# Altium PCB Project_PCBPcbDoc.PcbDoc
Units mil, origin at the board's own origin, x right, y up, seen from the top; angles counter-clockwise.
Board outline 1771.65 x 1377.95 mil, 4 copper layers (Top Layer, GND, PWR, Bottom Layer), stack 23.756 mil thick; 94 components, 61 nets, 344 pads, 210 vias.
Unrouted connection lines stored in the file: 22.
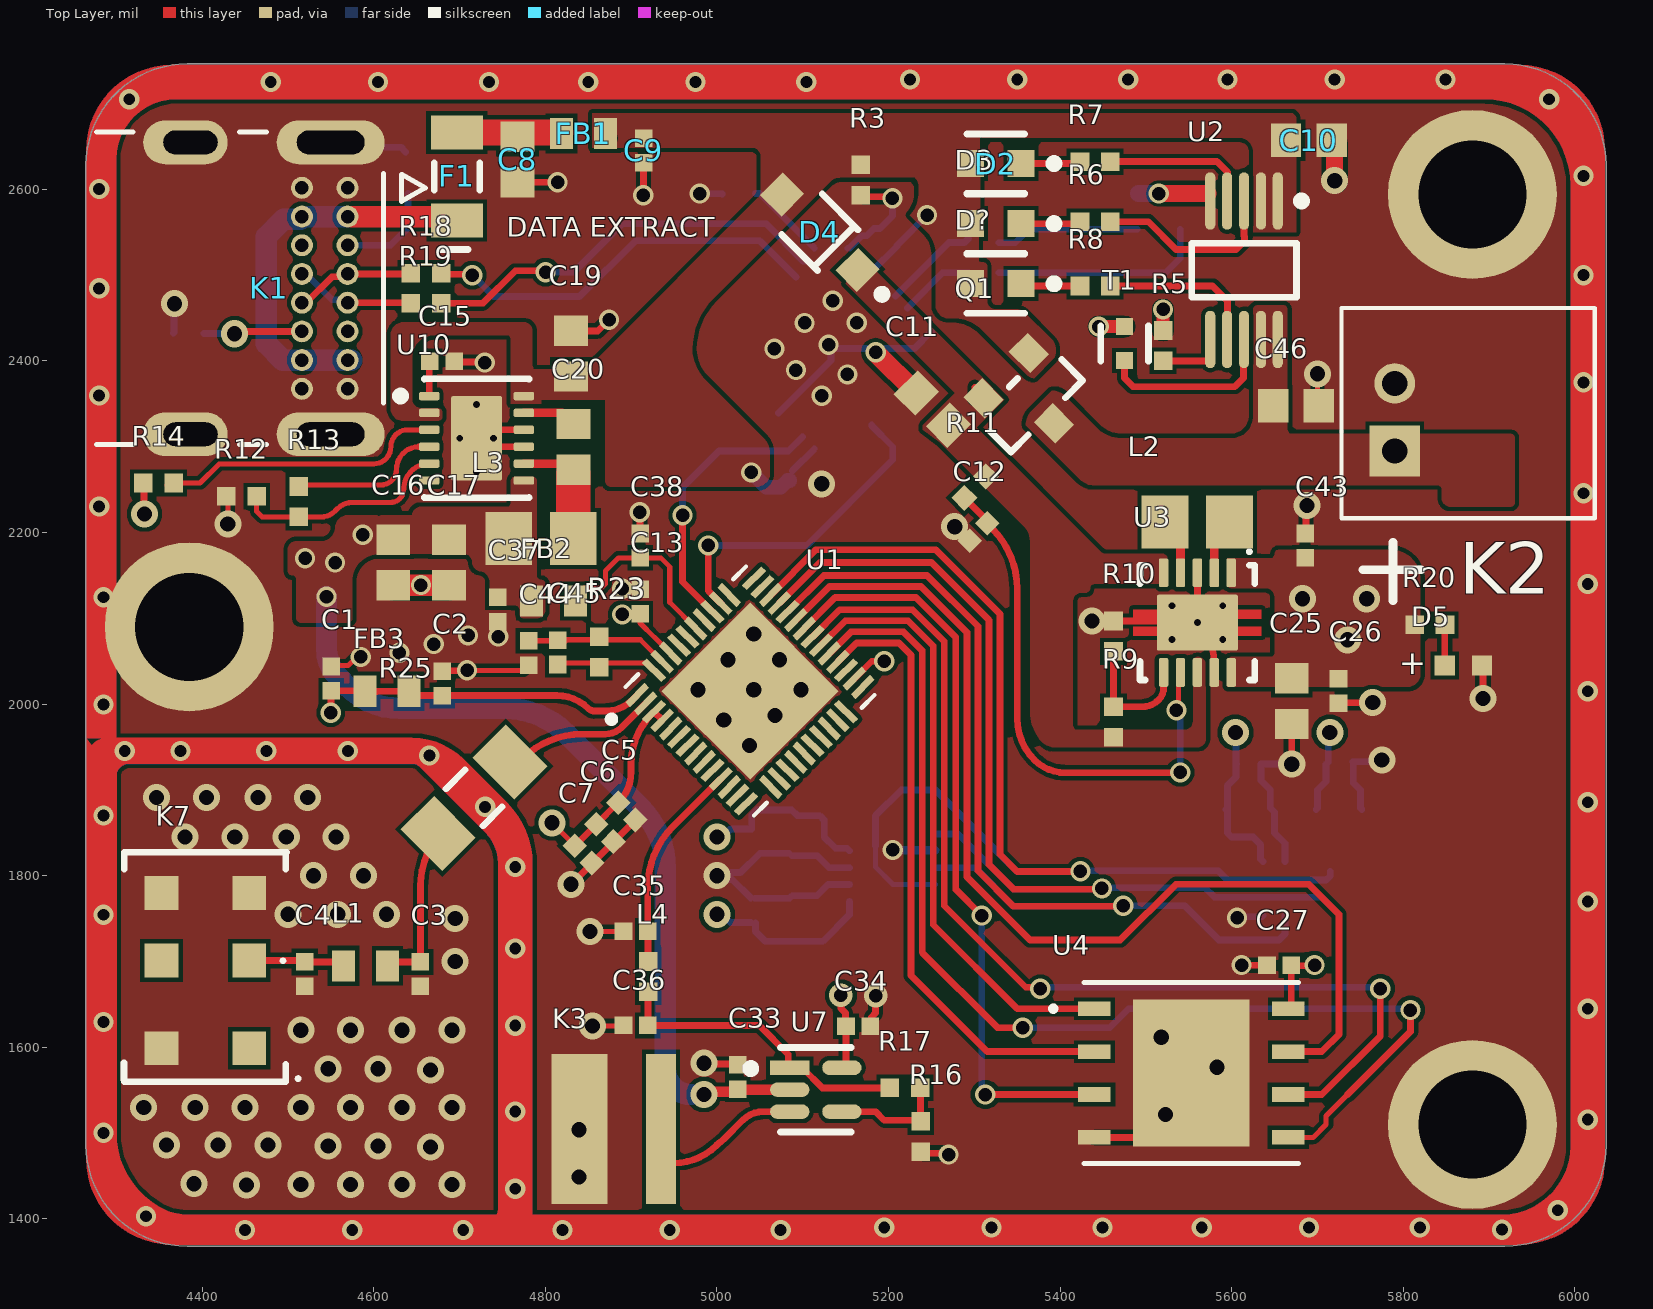
[diagram p0: Top Layer view]
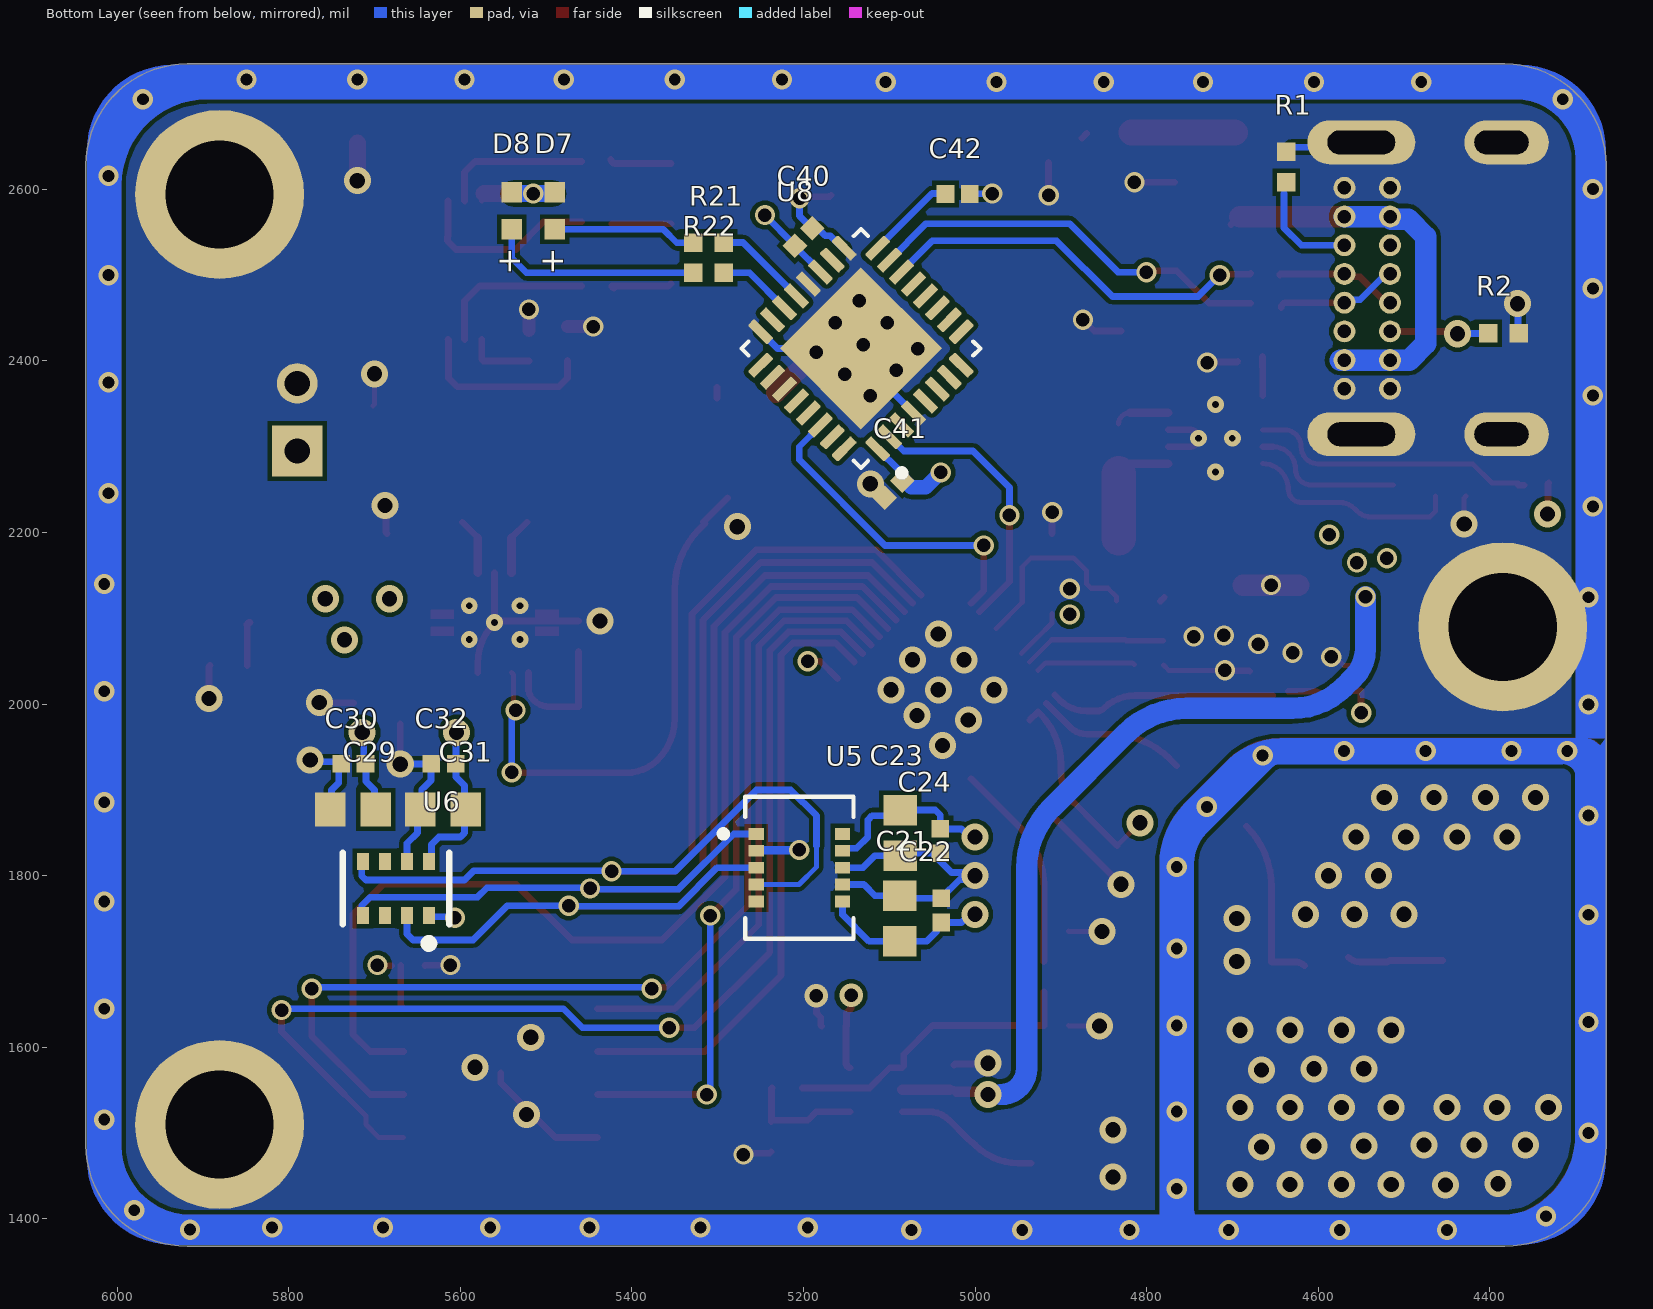
[diagram p1: Bottom Layer view, seen from below]
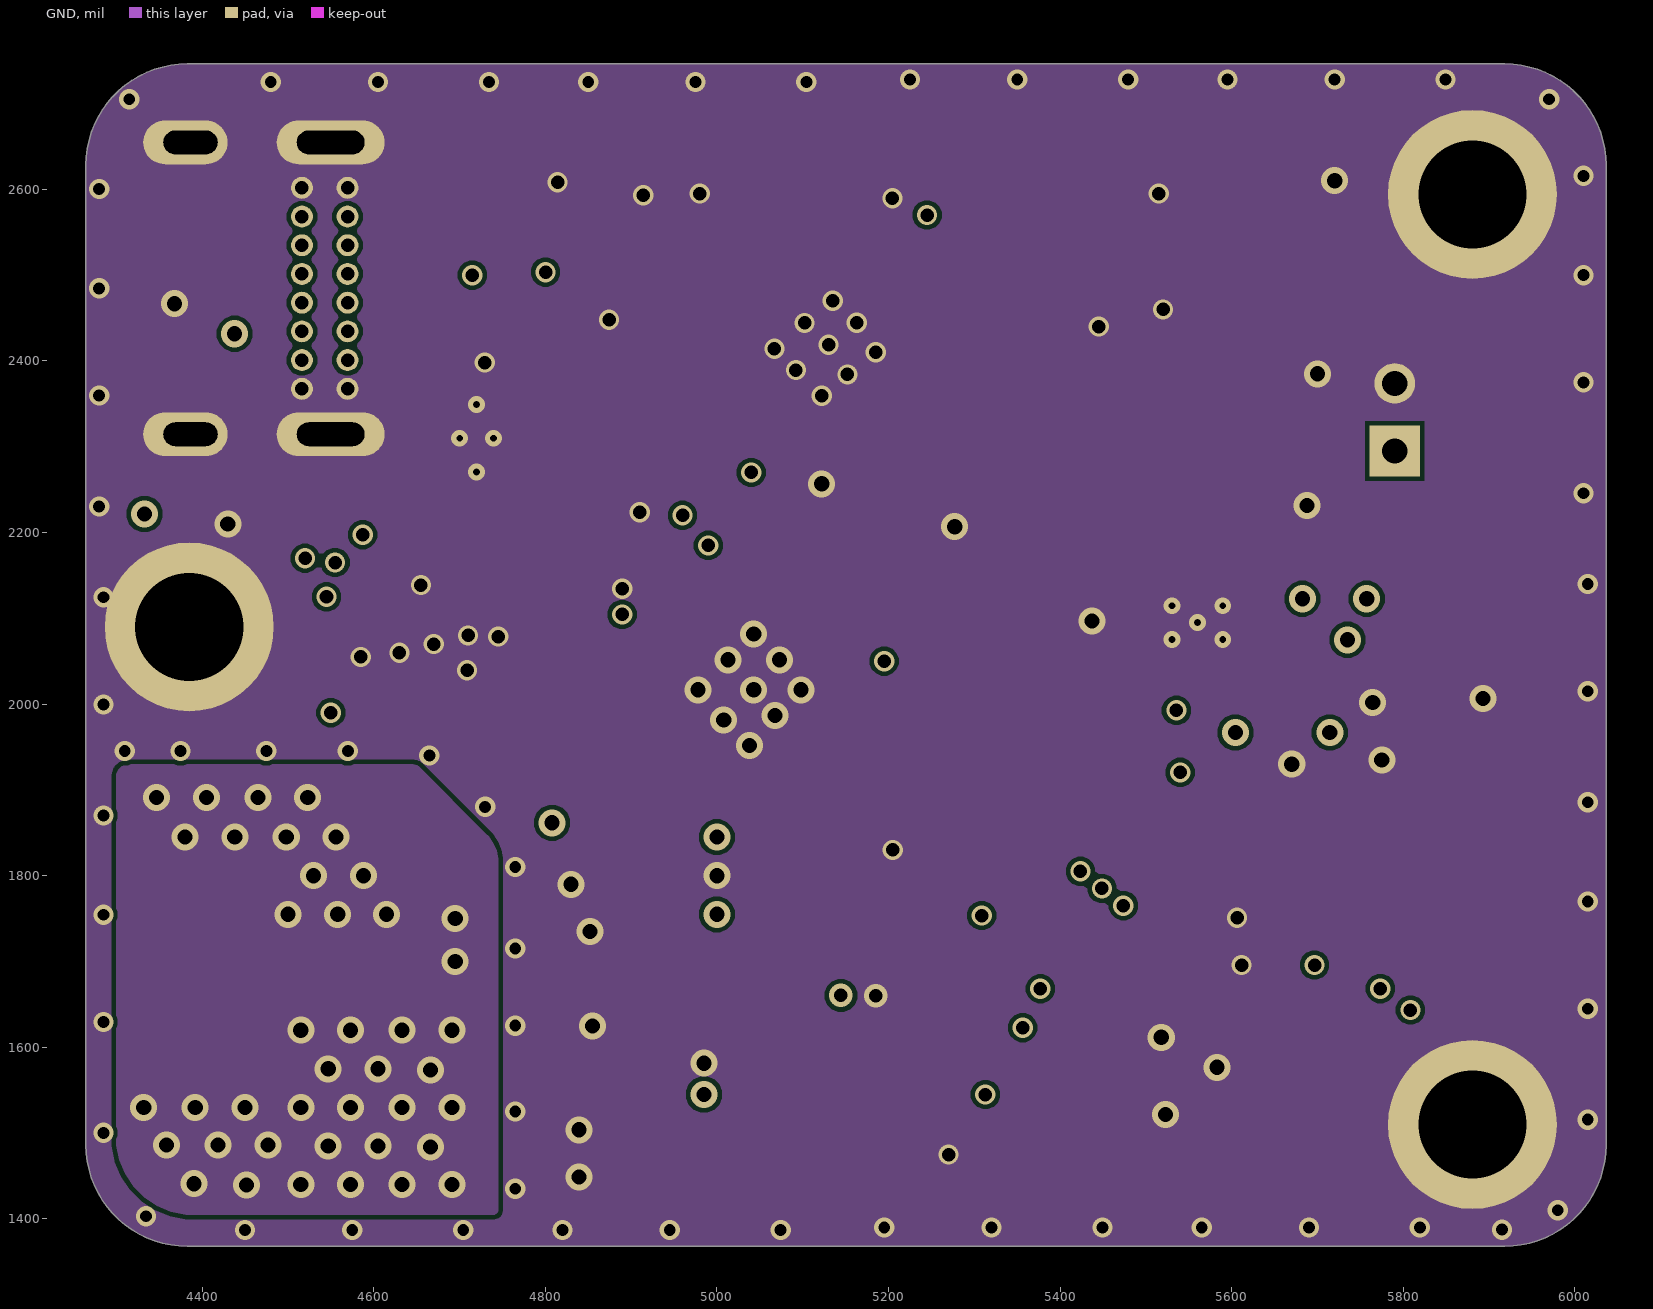
[diagram p2: GND]
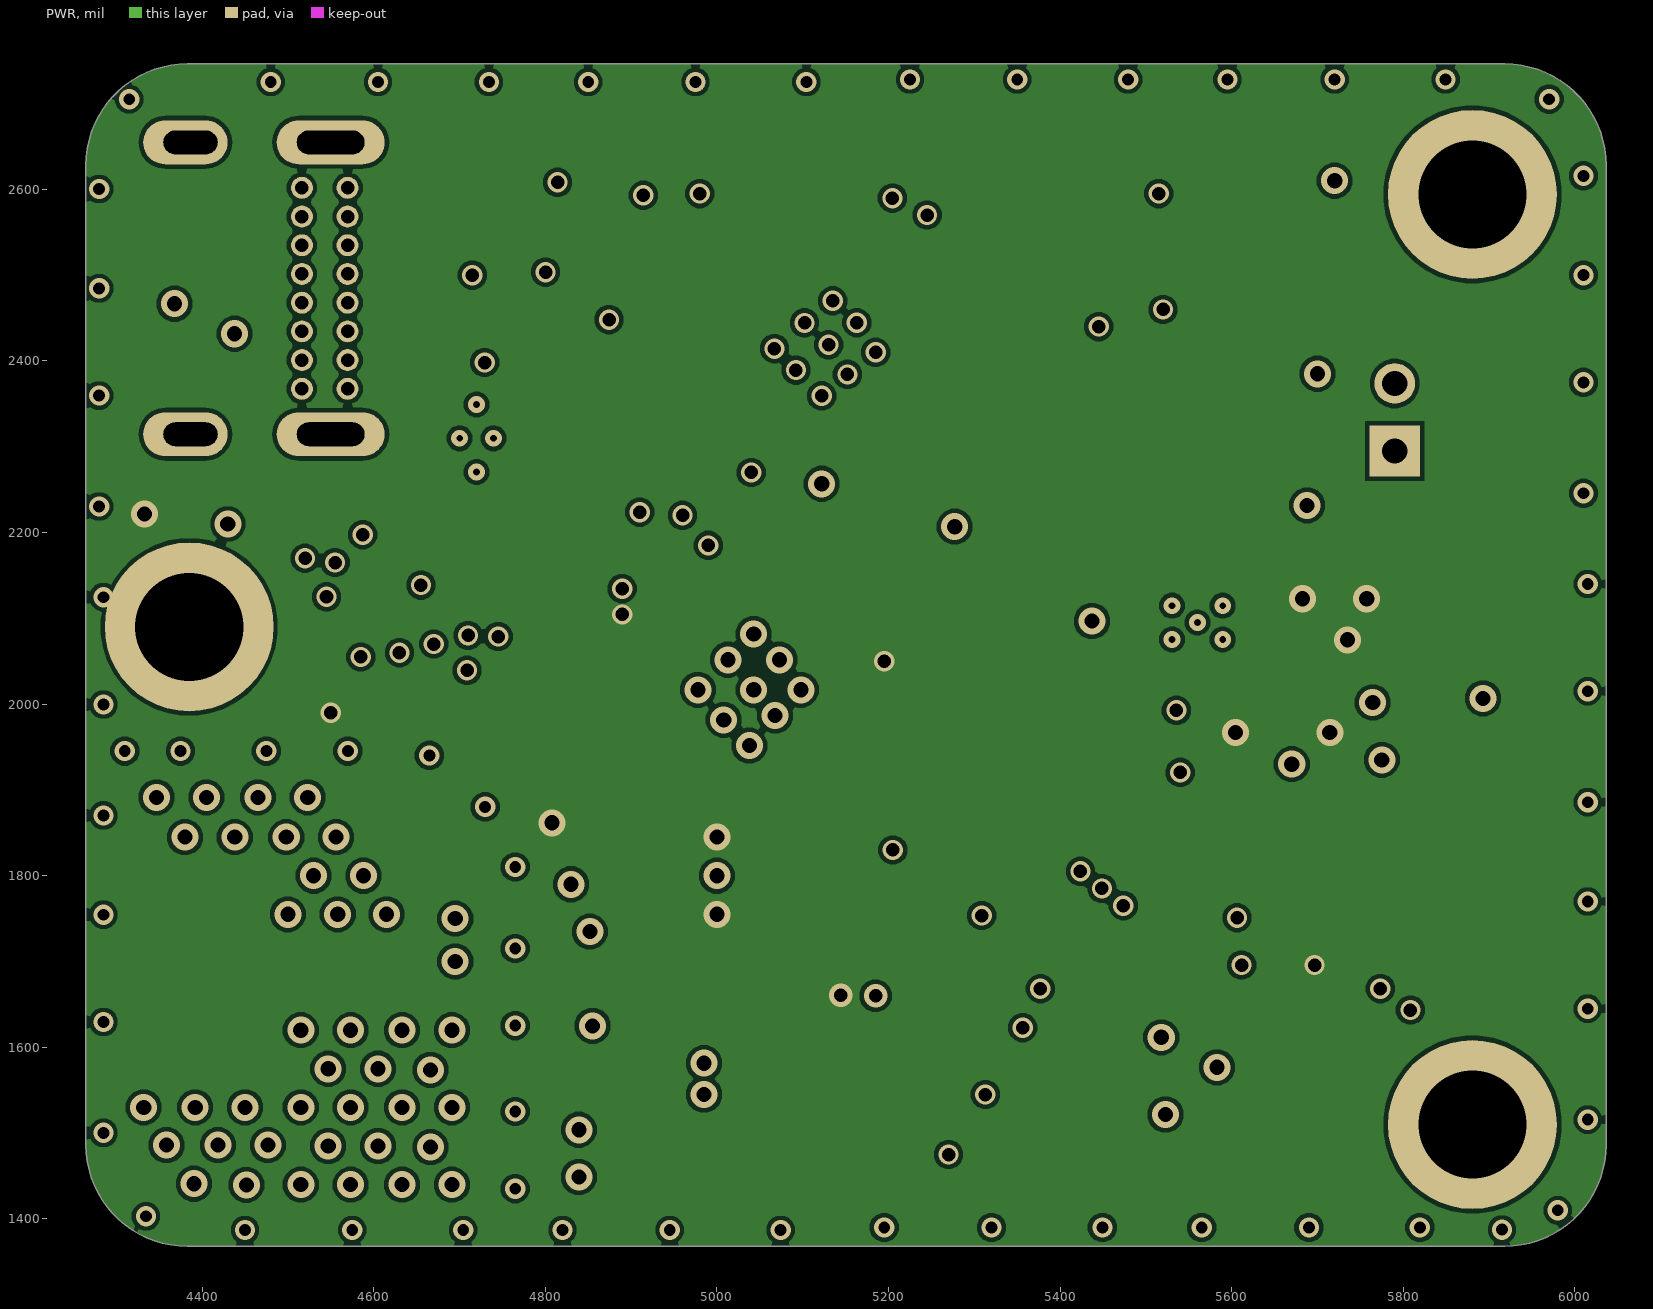
[diagram p3: PWR]
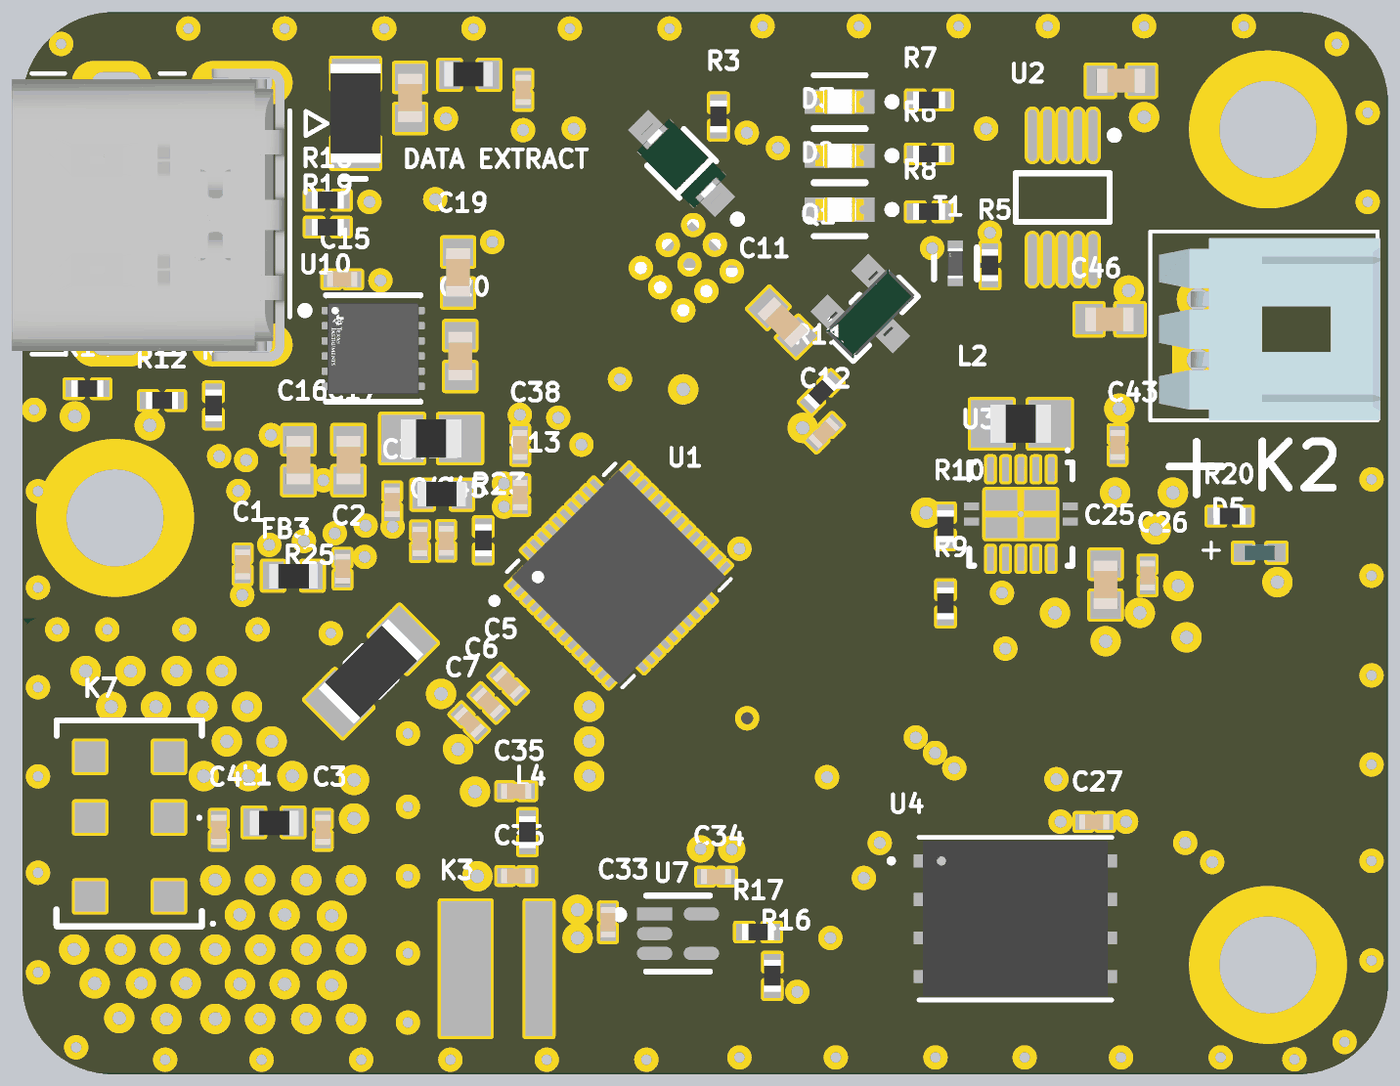
[diagram p4: 3D render of the assembled board from above, using the file's embedded part models]
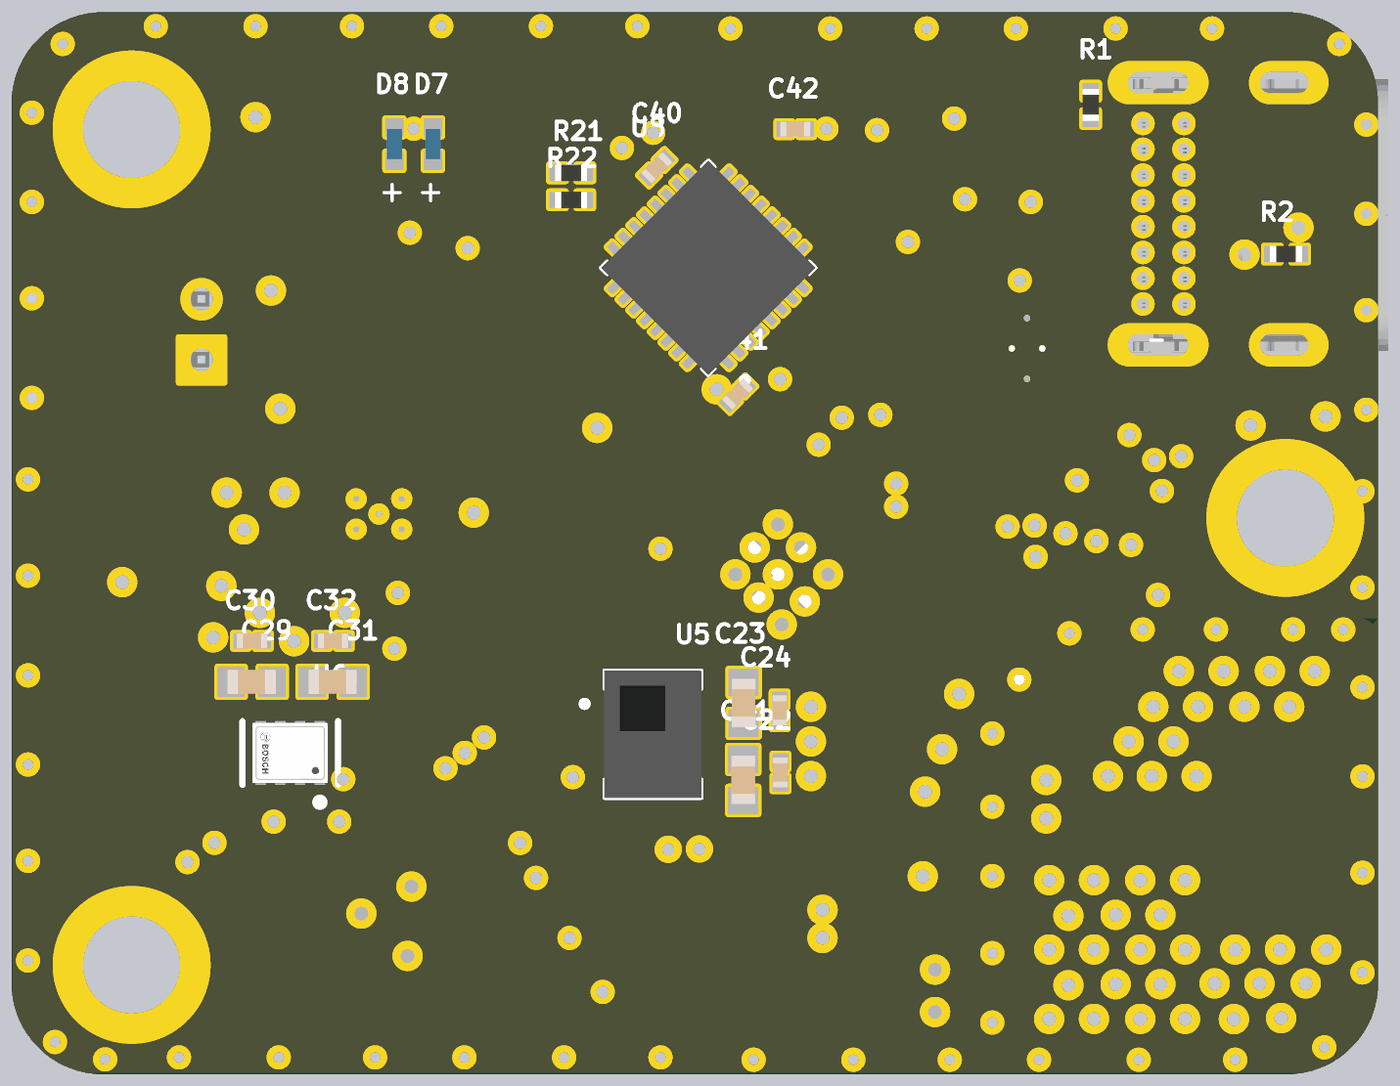
[diagram p5: 3D render of the assembled board from below, using the file's embedded part models]

## Layer stack, top to bottom
Top Solder: solder mask 0.4, Solder Resist, Dk 3.5
Top Layer: signal copper 1.4
Dielectric 2: prepreg 2.8, PP-006, Dk 4.1
GND: signal copper 1.378
Dielectric 1: dielectric 12.6, FR-4, Dk 4.8
PWR: signal copper 1.378
Dielectric 3: prepreg 2.8, PP-006, Dk 4.1
Bottom Layer: signal copper 1.4
Bottom Solder: solder mask 0.4, Solder Resist, Dk 3.5

## Board outline
4264.65,1486.26 4264.65,2627.99 cw(c4382.76,2627.99) 4382.76,2746.1 5918.19,2746.1 cw(c5918.19,2627.99) 6036.3,2627.99 6036.3,1486.26 cw(c5918.19,1486.26) 5918.19,1368.15 4382.76,1368.15 cw(c4382.76,1486.26)

## Design rules (kind name [scope] priority, off if disabled: settings)
Clearance [All] p1: gap=5 ignorepadtopadclearanceinfootprint=FALSE
PolygonConnect [All] p1: connectstyle=Direct reliefconductorwidth=10 reliefentries=4 polygonreliefangle="90 Angle" airgapwidth=10
RoutingVias [All] p1: holewidth=28 width=50 viastyle="Through Hole" minholewidth=28 minwidth=50 maxholewidth=28 maxwidth=50
SolderMaskExpansion [All] p1: expansion=4 istentingtop=FALSE
Width [All] p1: maxlimit=7.87 minlimit=5.91 preferedwidth=7.87
30 further rules are at their usual default settings.

## Components (designator, comment, footprint, x,y, rotation, side; value= is the part's Value field where it differs from the comment)
C1 "0.1uF" "0402 CAP" 4550,2030 r270 top
C2 "10uF" "0402 CAP" 4679.51,2024.52 r270 top
C3 "0.3pF" "0402 CAP" 4655,1685 r90 top
C4 "0.3pF" "0402 CAP" 4520,1685 r90 top
C5 "10uF" "0402 CAP" 4895.61,1875.08 r135 top
C6 "1uF" "0402 CAP" 4870,1850 r135 top
C7 "0.1uF" "0402 CAP" 4845,1825 r135 top
C8 "4.7uF" "0603 CAP" 4770,2635 r90 top
C9 "0.1uF" "0402 CAP" 4915,2645 r90 top
C10 "10uF" "0603 CAP" 5690,2655 r0 top
C11 "10uF" "0603 CAP" 5249.68,2342.14 r315 top
C12 "0.1uF" "0402 CAP" 5305,2200 r45 top
C13 "10uF" "0402 CAP" 4910,2120 r270 top
C15 "220nH" "0402 CAP" 4680,2400 r180 top
C16 "10uF" "0603 CAP" 4625,2165 r90 top
C17 "10uF" "0603 CAP" 4690,2165 r90 top
C19 "10uF" "0603 CAP" 4832.25,2408.51 r90 top
C20 "10uF" "0603 CAP" 4835,2300 r90 top
C21 "10uF" "0603 CAP" 5090,1750 r270 bottom
C22 "0.1uF" "0402 CAP" 5040,1760 r270 bottom
C23 "10uF" "0603 CAP" 5085,1850 r90 bottom
C24 "0.1uF" "0402 CAP" 5040,1840 r90 bottom
C25 "10uF" "0603 CAP" 5672.25,2003.51 r90 top
C26 "0.1uF" "0402 CAP" 5725,2015 r90 top
C27 "0.1uF" "0402 CAP" 5655,1695 r0 top
C29 "10uF" "0603 CAP" 5725,1875 r180 bottom
C30 "0.1uF" "0402 CAP" 5725,1930 r180 bottom
C31 "10uF" "0603 CAP" 5620,1875 r180 bottom
C32 "0.1uF" "0402 CAP" 5620,1930 r180 bottom
C33 "0.1uF" "0402 CAP" 5025,1565 r90 top
C34 "0.1uF" "0402 CAP" 5165,1625 r180 top
C35 "500nF" "0402 CAP" 4905,1735 r0 top
C36 "500nF" "0402 CAP" 4905,1625 r0 top
C37 "0.1uF" "0402 CAP" 4745,2110 r90 top
C38 "10uF" "0402 CAP" 4910,2185 r270 top
C40 "2.2uF" "0402 CAP" 5200,2545 r315 bottom
C41 "0.1uF" "0402 CAP" 5095,2250 r135 bottom
C42 "0.1uF" "0402 CAP" 5020,2595 r0 bottom
C43 "0.1uF" "0402 CAP" 5685,2185 r270 top
C44 "0.1uF" "0402 CAP" 4780,2060 r270 top
C45 "0.1uF" "0402 CAP" 4815,2060 r90 top
C46 "10uF" "0603 CAP" 5675,2350 r180 top
D2 "LTST-C190KGKT" FP-LTST-C190KGKT-MFG 5325,2630 r180 top
D3 "LTST-C190KGKT" FP-LTST-C190KGKT-MFG 5325,2560 r180 top
D4 "B130LAW-7-F" FP-SOD123-MFG 5120,2550 r135 top value=40pF
D5 "150040VS73240" WL-SMCC_0402_L1W0.5H0.4 5870,2045 r180 top
D7 "150040VS73240" WL-SMCC_0402_L1W0.5H0.4 5490,2575 r270 bottom
D8 "150040VS73240" WL-SMCC_0402_L1W0.5H0.4 5540,2575 r270 bottom
D? "LTST-C190KGKT" FP-LTST-C190KGKT-MFG 5325,2490 r180 top
F1 "600mA" s 4700,2615 r270 top
FB1 "120R@100MHZ" "0603 Inductor" 4845,2665 r180 top
FB2 "120R@100MHZ" "0603 Inductor" 4810,2120 r180 top
FB3 "120R@100MHZ" "0603 Inductor" 4615,2015 r0 top
K1 "USBC" usbc 4445,2480 r270 top locked
K2 "LiPo connector" "LiPo JST" 5788,2316.74 r270 top locked
K3 "pad_foam" pad_elastomer 4999,1471 r0 top
K7 "antenna" "BLE/WIFI antenna" 4360.64,1676 r0 top
L1 "2nH" "0603 Inductor" 4590,1695 r0 top
L2 "2.2uH" "power inductor" 5560,2215 r0 top
L3 "4.7uH" "power inductor" 4795,2190 r180 top
L4 "400nH" "0402 RES" 4922.28,1681.4 r90 top
Q1 "DMP1045U-7" FP-SOT23-MFG 5365,2355 r315 top
R1 "5.11k" "0402 RES" 4635,2625 r90 bottom
R2 "5.11k" "0402 RES" 4385,2430 r180 bottom
R3 "100kR" "0402 RES" 5170,2610 r90 top
R5 "2kR" "0402 RES" 5517.72,2418.6 r270 top
R6 "1kR" "0402 RES" 5440,2560 r0 top
R7 "1kR" "0402 RES" 5440,2630 r0 top
R8 "1kR" "0402 RES" 5440,2485 r0 top
R9 "136.2kR" "0402 RES" 5460,1980 r270 top
R10 "68.1kR" "0402 RES" 5460,2080 r270 top
R11 "100R" "0402 RES" 5300,2255 r225 top
R12 "47kR" "0402 RES" 4445,2240 r0 top
R13 "174.9kR" "0402 RES" 4515,2235 r90 top
R14 "100kR" "0402 RES" 4350,2260 r180 top
R16 "330kR" "0402 RES" 5240,1495 r90 top
R17 "30kR" "0402 RES" 5220,1555 r180 top
R18 "33R" "0402 RES" 4660,2500 r0 top
R19 "33R" "0402 RES" 4660,2465 r0 top
R20 "1kR" "0402 RES" 5830,2090 r0 top
R21 "1kR" "0402 RES" 5310,2540 r0 bottom
R22 "1kR" "0402 RES" 5310,2505 r0 bottom
R23 "1kR" "0402 RES" 4865,2060 r90 top
R25 "0R" "1206 RES" 4715,1885 r45 top
T1 "Nom 10kR" FP-NTCG10-MFG 5475,2420.32 r90 top
U1 "ESP32" esp32 5038.6,2015.27 r45 top
U2 "MCP73833-GPI/UN" MSOP-UN10_N 5614.37,2505.71 r270 top
U3 "TPS63001DRCR" DRC0010J_V 5560,2095 r270 top
U4 "flash storage" "flash storage" 5543.77,1549.15 r0 top
U5 "ir temp sensor" "IR temp sensor" 5209.8,1799.37 r180 bottom
U6 "BMP280" FP-BMP280-MFG 5675,1785 r270 bottom
U7 "MCP6006T-E/LT" FP-C04-061-LT-IPC_C 5115.32,1550.59 r0 top
U8 "ftdi" ftdi 5131.79,2413.97 r45 bottom
U10 "TPS63710DRRT" FP-DRR0012C-MFG 4719.88,2309.84 r0 top

## Footprints (in the part's own frame and the unit in brackets; to place one, negate y for a bottom-side part, rotate by r counter-clockwise, add the part's x,y. Pads: shape width x height; smd on the part's side, far side on the other; paste and mask are expansions set on the pad)
"0402 CAP" [mm]
  rect 0.52x0.52 smd: 1(-0.351,0.013) 2(0.369,0.013)
  body extent -0.49,-0.24 0.51,0.26, height 0.46
"0402 RES" [mm]
  rect 0.55x0.55 smd: 1(-0.428,0.058) 2(0.472,0.058)
  body extent -0.5,-0.22 0.55,0.33, height 0.4
"0603 CAP" [mm]
  rect 0.9x1 smd: 1(-0.677,0.057) 2(0.673,0.057)
  body extent -0.8,-0.34 0.8,0.46, height 0.78
"0603 Inductor" [mm]
  rect 0.68x0.92 smd: 1(-0.635,0) 2(0.66,0)
  body extent -0.76,-0.42 0.84,0.38, height 0.81
"1206 RES" [mm]
  rect 1.4x1.75 smd: 1(-1.36,0.069) 2(1.64,0.069)
  silkscreen extent -0.26,-0.71 0.54,0.84, body extent -1.48,-0.76 1.77,0.89, height 0.7
"BLE/WIFI antenna" [mm]
  rect 1x1 smd: 1(2.397,-1.958) 2(2.397,0.642) 3(2.397,2.642) 4(-0.203,2.642) 5(-0.203,0.642) 6(-0.203,-1.958)
  silkscreen extent -1.31,-2.95 3.89,3.84, body extent -1.15,-2.82 3.35,3.69, height 0.5
DRC0010J_V [mm] "SON, 10-Leads, Body 3x3mm, Pitch 0.5mm, Thermal Pad 2.4x1.65mm, TI Recommended"
  rrect36% 0.85x0.28 smd paste-0.025 mask+0.07: 1(-1.475,1) 2(-1.475,0.5) 3(-1.475,0) 4(-1.475,-0.5) 5(-1.475,-1) 6(1.475,-1) 7(1.475,-0.5) 8(1.475,0) 9(1.475,0.5) 10(1.475,1)
  rrect6% 1.65x2.4 smd paste-0.825 mask+0.07: 11(0,0)
  Top Layer region: -0.39,1.2 -0.11,1.2 -0.11,1.9 -0.39,1.9
  Top Layer region: 0.39,1.9 0.11,1.9 0.11,1.2 0.39,1.2
  Top Layer region: 0.39,-1.2 0.11,-1.2 0.11,-1.9 0.39,-1.9
  Top Layer region: -0.39,-1.9 -0.11,-1.9 -0.11,-1.2 -0.39,-1.2
  silkscreen extent -2.15,-1.7 1.7,1.7, body extent -1.55,-1.55 1.55,1.55, height 1
esp32 [mm]
  rrect5% 0.81x0.2 smd: 1(-2.445,2.275) 2(-2.445,1.925) 3(-2.445,1.575) 4(-2.445,1.225) 5(-2.445,0.875) 6(-2.445,0.525) 7(-2.445,0.175) 8(-2.445,-0.175) 9(-2.445,-0.525) 10(-2.445,-0.875) 11(-2.445,-1.225) 12(-2.445,-1.575) 13(-2.445,-1.925) 14(-2.445,-2.275) 25(2.445,-2.275) 26(2.445,-1.925) 27(2.445,-1.575) 28(2.445,-1.225) 29(2.445,-0.875) 30(2.445,-0.525) 31(2.445,-0.175) 32(2.445,0.175) 33(2.445,0.525) 34(2.445,0.875) 35(2.445,1.225) 36(2.445,1.575) 37(2.445,1.925) 38(2.445,2.275)
  rrect5% 0.2x0.81 smd: 15(-1.575,-2.445) 16(-1.225,-2.445) 17(-0.875,-2.445) 18(-0.525,-2.445) 19(-0.175,-2.445) 20(0.175,-2.445) 21(0.525,-2.445) 22(0.875,-2.445) 23(1.225,-2.445) 24(1.575,-2.445) 39(1.575,2.445) 40(1.225,2.445) 41(0.875,2.445) 42(0.525,2.445) 43(0.175,2.445) 44(-0.175,2.445) 45(-0.525,2.445) 46(-0.875,2.445) 47(-1.225,2.445) 48(-1.575,2.445)
  rect 3.7x3.7 smd paste-3: 49(0,0)
  silkscreen extent -3.59,-2.69 2.52,2.69, body extent -2.54,-2.54 2.46,2.46, height 0.9
"flash storage" [mil]
  rect 38x17 smd paste+0 mask+0: 1(-103.77,95.85) 2(-103.77,45.85) 3(-103.77,-4.15) 4(-103.77,-54.15) 5(122.23,-54.15) 6(122.23,-4.15) 7(122.23,45.85) 8(122.23,95.85)
  rect 136x171 smd paste+0 mask+0: 9(9.23,20.85)
  silkscreen extent -155,-85 134,126, body extent -111,-80 129,121, height 32
FP-BMP280-MFG [mm]
  rect 0.5x0.35 smd paste+0 mask+0: 1(0.8,0.975) 2(0.8,0.325) 3(0.8,-0.325) 4(0.8,-0.975) 5(-0.8,-0.975) 6(-0.8,-0.325) 7(-0.8,0.325) 8(-0.8,0.975)
  silkscreen extent -1.05,-1.58 1.75,1.58, body extent -1,-1.25 1,1.25, height 1
FP-C04-061-LT-IPC_C [mm]
  rect 1.164x0.43 smd paste+0 mask+0: 1(-0.77,0.65)
  rrect100% 1.164x0.43 smd paste+0 mask+0: 2(-0.77,0) 3(-0.77,-0.65) 4(0.77,-0.65) 5(0.77,0.65)
  silkscreen extent -2.05,-1.25 1.05,1.25
FP-DRR0012C-MFG [mm]
  rrect40% 0.6x0.25 smd paste+0 mask+0: 1(-1.4,1.25) 2(-1.4,0.75) 3(-1.4,0.25) 4(-1.4,-0.25) 5(-1.4,-0.75) 6(-1.4,-1.25) 7(1.4,-1.25) 8(1.4,-0.75) 9(1.4,-0.25) 10(1.4,0.25) 11(1.4,0.75) 12(1.4,1.25)
  rrect7% 1.5x2.5 smd paste-1000 mask+0: 13(0,0)
  silkscreen extent -2.37,-1.76 1.55,1.76, body extent -1.8,-1.65 1.8,1.65, height 0.25
FP-LTST-C190KGKT-MFG [mm]
  rect 0.8x0.8 smd paste+0 mask+0: 1(-0.75,0) 2(0.75,0)
  silkscreen extent -1.85,-0.87 0.85,0.87, body extent -1.25,-0.55 1.25,0.55, height 0.25
FP-NTCG10-MFG [mm]
  rect 0.5x0.5 smd paste+0 mask+0: 1(-0.5,0) 2(0.5,0)
  silkscreen extent -0.53,-0.71 0.53,0.7, body extent -0.85,-0.38 0.85,0.38, height 0.25
FP-SOD123-MFG [mm]
  rect 0.9x0.95 smd paste+0 mask+0: 1(-1.575,0) 2(1.575,0)
  silkscreen extent -2.72,-0.85 0.75,0.85, body extent -2.12,-0.95 2.12,0.95, height 0.25
FP-SOT23-MFG [mm]
  rect 0.9x0.8 smd paste+0 mask+0: 1(-1,0.95) 2(-1,-0.95) 3(1,0)
  silkscreen extent -0.7,-1.5 0.7,1.5, body extent -1.55,-1.6 1.55,1.6, height 0.25
ftdi [mm]
  rrect25% 0.81x0.27 smd: 1(-2.418,1.764) 2(-2.418,1.264) 3(-2.418,0.764) 4(-2.418,0.264) 5(-2.418,-0.236) 6(-2.418,-0.736) 7(-2.418,-1.236) 8(-2.418,-1.736) 17(2.482,-1.736) 18(2.482,-1.236) 19(2.482,-0.736) 20(2.482,-0.236) 21(2.482,0.264) 22(2.482,0.764) 23(2.482,1.264) 24(2.482,1.764)
  rrect25% 0.27x0.81 smd: 9(-1.718,-2.436) 10(-1.218,-2.436) 11(-0.718,-2.436) 12(-0.218,-2.436) 13(0.282,-2.436) 14(0.782,-2.436) 15(1.282,-2.436) 16(1.782,-2.436) 25(1.782,2.464) 26(1.282,2.464) 27(0.782,2.464) 28(0.282,2.464) 29(-0.218,2.464) 30(-0.718,2.464) 31(-1.218,2.464) 32(-1.718,2.464)
  rect 3.4x3.4 smd paste-0.62: 33(0.032,0.014)
  silkscreen extent -3.53,-2.49 2.53,2.51, body extent -2.47,-2.49 2.53,2.51, height 0.9
"IR temp sensor" [mm]
  rect 0.45x0.35 smd paste-1 mask+0.05: 1(-1.148,1.254) 2(-1.148,0.754) 3(-1.148,0.254) 4(-1.148,-0.246) 5(-1.148,-0.746) 6(1.402,-0.746) 7(1.402,-0.246) 8(1.402,0.254) 9(1.402,0.754) 10(1.402,1.254)
  silkscreen extent -2.22,-1.85 1.73,2.35, body extent -1.47,-1.85 1.73,2.35, height 1.46
"LiPo JST" [mm]
  rect 1.5x1.5 hole 0.75: 1(0.552,0.051)
  round 1.2 hole 0.75: 2(-1.448,0.051)
  silkscreen extent -3.68,-1.52 4.98,5.97, body extent -3.46,-1.24 2.54,6.06, height 4.2
MSOP-UN10_N [mm] "TSSOP, 10-Leads, Body 3x3mm, Pitch 0.5mm, IPC Medium Density"
  oval 1.7x0.3 smd: 1(-2.05,1) 2(-2.05,0.5) 3(-2.05,0) 4(-2.05,-0.5) 5(-2.05,-1) 6(2.05,-1) 7(2.05,-0.5) 8(2.05,0) 9(2.05,0.5) 10(2.05,1)
  silkscreen extent -2.17,-1.55 0.8,1.83, body extent -1.55,-1.55 1.55,1.55, height 1.1
pad_elastomer [mil]
  rect 65x175 smd: 1(-159,34)
  rect 35x175 smd: 2(-64,34)
"power inductor" [mm]
  rect 1.39x1.57 smd: 1(-0.955,-0.076) 2(0.955,-0.076)
  body extent -1,-0.7 1,0.55, height 1.02
s [mm]
  rect 1x1.55 smd: 1(-1.3,-0.076) 2(1.3,-0.076)
  silkscreen extent -0.4,-0.75 2.16,0.6, body extent -1.62,-0.9 1.63,0.75, height 0.7
usbc [mm]
  round 0.648 hole 0.4 mask+0.064: A1(-3.092,3.164) A4(-2.242,3.164) A5(-1.392,3.164) A6(-0.542,3.164) A7(0.308,3.164) A8(1.158,3.164) A9(2.008,3.164) A12(2.858,3.164) B1(2.858,1.814) B4(2.008,1.814) B5(1.158,1.814) B6(0.308,1.814) B7(-0.542,1.814) B8(-1.392,1.814) B9(-2.242,1.814) B12(-3.092,1.814)
  oval 1.3x2.5 hole 0.7 slot 1.6 at 90 deg copper offset 0,-0.15 mask+0.064: SH1(-4.437,-1.486) SH2(4.203,-1.486)
  oval 1.3x3.2 hole 0.7 slot 2 at 90 deg mask+0.064: SH3(-4.437,2.664) SH4(4.203,2.664)
  silkscreen extent -4.74,-4.26 4.51,5.46, body extent -4.9,-4.92 4.74,4.05, height 3.17
WL-SMCC_0402_L1W0.5H0.4 [mm] "SMD Mono-color Chip LED Compact, body 1x0.5mm"
  rect 0.6x0.6 smd: 1(-0.55,0) 2(0.55,0)
  body extent -0.5,-0.25 0.5,0.25, height 0.4

## Part data
C1 C2 C3 C4 C5 C6 C7 C8 C9 C10 C11 C12 C13 C15 C16 C17 C19 C20 C21 C22 C23 C24 C25 C26 C27 C29 C30 C31 C32 C33 C34 C35 C36 C37 C38 C40 C41 C42 C43 C44 C45 C46: library part capacitor
D2 D3 D?: library part CMP-2000-05197-2, "LED GREEN CLEAR CHIP SMD", Case Code (Imperial)=0603, Case Code (Metric)=1608, Color=Green, Forward Current=30mA, Forward Voltage=2V, Lens Color=Colorless, Max Operating Temperature=85°C, Min Operating Temperature=-55°C, Package Quantity=1, Power Dissipation=75mW, Reverse Voltage=5V, Test Current=20mA, Case/Package=0603, Depth=0.8mm, Dominant Wavelength=571nm, Height=0.8mm, Illumination Color=Green, Lead Free="Lead Free", Length=1.6mm, Lens Style=Diffused, Lens Transparency=Clear, Luminous Intensity=35mcd, Mount="Surface Mount", Number of Elements=1, Number of LEDs=1, Number of Pins=2, Packaging="Tape and Reel", Power Rating=75mW, Radiation Hardening=No, Viewing Angle=130°, Wavelength=574nm, Width=0.8mm
D4: library part CMP-2000-05884-2, "DIODE SCHOTTKY 30V 1A SOD123", Capacitance=40pF, Forward Current=1A, Manufacturer="Diodes Inc.", Max Junction Temp=+125°C, Max Repetitive Reverse Voltage=30V, Max Surge Forward Current=12A, Package=SOD123, Peak Reverse Current=0.15mA, Temperature="-55°C to +125°C", Temperature Range Low=-55°C, Automotive=No, Category=Diode, ComponentLink2Description=Datasheet, ComponentLink2URL=https://www.diodes.com/assets/Datasheets/ds30308.pdf, Device Class L1="Discrete Semiconductors", Device Class L2=Diodes, Device Class L3="Schottky Diodes", Digikey Description="DIODE SCHOTTKY 30V 1A SOD123", Footprint Url=https://www.diodes.com/assets/Package-Files/SOD123.pdf, Height=1.45mm, Ipc Land Pattern Name=SOD365155X110-2, Lead Free=Yes, Manufacturer Part Number=B130LAW-7-F, Mouser Description="Schottky Diodes & Rectifiers 30V 1A", Octopart=https://octopart.com/b130law-7-f-diodes+inc.-325739, Reverse Voltage=30V, RoHS=TRUE, Standoff Height=0mm, Temperature Range High=+125°C
D5 D7 D8: library part CMP-03913-90235559-1, "150040VS73240 WL-SMCC SMT Mono-Color Chip LED Compact", Case/Package=0402, Color=Green, Forward Current=60mA, Forward Voltage=2V, Max Junction Temperature (Tj)=95°C, Max Operating Temperature=85°C, Max Reverse Voltage (DC)=5V, Min Operating Temperature=-40°C, Power Dissipation=75mW, Dominant Wavelength=570nm, Height=400µm, Length=1mm, Luminous Intensity=50mcd, NexarPartId=90235559, Packaging="Tape and Reel", Peak Wavelength=572nm, Reverse Voltage=5V, RoHS=Compliant, Viewing Angle=120°, Wavelength=570nm, Width=500µm
F1: library part polyfuse
FB1 FB2 FB3: library part "Ferrite Bead"
L1 L4: library part "inductor 0603"
L2 L3: library part "power inductor"
Q1: library part CMP-12801-000025-1, "MOSFET P-CH 12V 4A SOT23", Continuous Drain Current=4A, Drain To Source Breakdown Voltage=-12V, Drain To Source Resistance=26mΩ, Gate To Source Voltage=8V, Input Capacitace At Vds="1357pF @ -10V", Manufacturer="Diodes Inc.", Max Junction Temp=+150°C, Package=SOT23, Power Dissipation=0.8W, Pulse Drain Current=40A, Temperature="-55°C to +150°C", Temperature Range Low=-55°C, Typ Forward Diode Voltage=-0.6V, Automotive=No, Automotive Grade=NA, Category=Trans, ComponentLink2Description=Datasheet, ComponentLink2URL=https://www.diodes.com/assets/Datasheets/DMP1045U.pdf, Depletion Mode=False, Device Class L1="Discrete Semiconductors", Device Class L2=Transistors, Device Class L3=MOSFETs, Digikey Description="MOSFET P-CH 12V 4A SOT23", Drain To Source Voltage=-12V, Footprint Url=https://www.diodes.com/assets/Package-Files/SOT23.pdf, Gate Charge At Vgs="15.8nC @ -4.5V", Height=1.1mm, Ipc Land Pattern Name=SOT92P240X102-3, Lead Free=Yes, Manufacturer Part Number=DMP1045U-7, Mouser Description="P-Channel 12 V 31 mOhm Surface Mount Enhancement Mode Mosfet - SOT-23-3", Number Of Channels=1, Number Of P Channels=1, Octopart=https://octopart.com/dmp1045u-7-diodes+inc.-20474459, RoHS=TRUE, Rthja Max=168°C/W, Standoff Height=0.013mm, Temperature Range High=+150°C, Threshold Vgs Max=-1V, Threshold Vgs Min=-0.3V, Turn Off Delay Time=91.2ns, Turn On Delay Time=15.7ns
R1 R2 R3 R5 R6 R7 R8 R9 R10 R11 R12 R13 R14 R16 R17 R18 R19 R20 R21 R22 R23: library part Resistor
R25: library part "0603 RES"
T1: library part CMP-08233-000003-1, "THERMISTOR NTC 10KOHM 3380K 0402", Case Code (Imperial)=0402, Case Code (Metric)=1005, Max Operating Temperature=125°C, Min Operating Temperature=-40°C, Tolerance=1%, Case/Package=0402, Mount="Surface Mount", Number of Pins=2, Packaging="Tape and Reel"
U2: library part CMP-0133-00193-1, "Stand-Alone Linear Li-Ion/Li-Polymer Charge Management Controller with Power-Good Output, 4.2V, 10-Pin MSOP, Industrial Temperature", DatasheetVersion="revB, May-2009", PackageDescription="10-Lead Plastic Micro Small Outline Package (UN) [MSOP]", PackageReference=MSOP-UN10, PackageVersion="revBB, Aug-2009"
U3: library part CMP-0345-00006-2, "Buck-Boost Voltage Converter with 1.8 to 5.5 V Input and 3.3 V Output, -40 to 85 degC, 10-Pin SON (DRC), Green (RoHS & no Sb/Br)", Dynamic Voltage Scaling=TRUE, Manufacturer="Texas Instruments", Switching Frequency(Max)(kHz)=1500, ComponentLink1Description=Datasheet, ComponentLink1URL=http://www.ti.com/general/docs/lit/getliterature.tsp?genericPartNumber=TPS63001&fileType=pdf, ComponentLink2Description="Package Specification", ComponentLink2URL=http://www.ti.com/litv/pdf/mpds117k, DatasheetVersion=SLVS520B, Eco-Plan="Green (RoHS & no Sb/Br)", Iout(Max)(A)=1.2, Iq(Typ)(mA)=0.03, Mounting Technology="Surface Mount", PackageDescription="10-Pin Plastic Small Outline No-Lead, 3 x 3 x 1 mm Body, 0.5 mm Pitch, Exposed Pad", PackageReference=DRC0010J, PackageVersion="revL, Sep-2011", PartNumber=TPS63001DRCR, Preset Vout(V)=3.3, Regulated Outputs(#)=1, SubFamily="Buck-Boost Regulator", Synchronous Rectification=TRUE, Topology=Buck-Boost, Vin(Max)(V)=5.5, Vin(Min)(V)=1.8, Vout(Max)(V)=3.3, Vout(Min)(V)=3.3
U6: library part CMP-2000-05076-3, "SENSOR PRESSURE ABS", Case/Package=SMD/SMT, Max Operating Temperature=85°C, Min Operating Temperature=-40°C, Operating Pressure=15.95PSI, Lead Free="Lead Free", Max Pressure=290.08PSI, Number of Pins=8, Output Type=SPI, Port Style="No Port", Pressure Type=Absolute, Termination=SMD/SMT
U7: library part CMP-06302-000287-1, "IC OPAMP GP 1 CIRCUIT SC70-5", RoHS Compliant=Yes
U10: library part CMP-04918-000368-1, "IC REG BUCK ADJUSTABLE 1A 12SON", Max Input Voltage=14V, Max Operating Temperature=125°C, Max Output Voltage=-5.5V, Min Input Voltage=3.1V, Min Operating Temperature=-40°C, Min Output Voltage=-1V, Output Current=1A, Switching Frequency=1.5MHz, Mount="Surface Mount", Number of Outputs=1, Output Configuration=Negative, Output Type=Adjustable, Packaging="Tape and Reel", RoHS Compliant=Yes, Synchronous Rectifier=Yes

## Free pads (board coordinates)
  round 196.85 hole 125.98: 2(4385,2090) 2(5880.63,1510) 2(5880.63,2594.04)

## Via types
v1: diameter 23.62/23.62/23.62/23.62 (per signal layer), hole 13.78, Top Layer to Bottom Layer, 60 vias
v2: diameter 23.62, hole 15.75, Top Layer to Bottom Layer, 47 vias
v3: diameter 31.5/31.5/31.5/31.5 (per signal layer), hole 17.72, Top Layer to Bottom Layer, 43 vias
v4: diameter 31.5, hole 17.72, Top Layer to Bottom Layer, 40 vias
v5: diameter 23.62/23.62/23.62/23.62 (per signal layer), hole 15.75, Top Layer to Bottom Layer, 9 vias
v6: diameter 19.68, hole 7.87, Top Layer to Bottom Layer, 9 vias
v7: diameter 27.56, hole 15.75, Top Layer to Bottom Layer, 2 vias

## Nets (pads, with @x,y where several pads share a name; then routed paths per layer and width w, separated by ;. In a path a pad name is that pad's centre, name@x,y a point inside that pad or via, vN(x,y) a via of type N, cw(c..) or ccw(c..) an arc to the next point about the centre after c; other vN are vias at no path point)
+3V3: C1.2 C5.2 C6.2 C7.2 C13.2 C21.2 C22.2 C23.2 C24.2 C25.2 C26.2 C27.2 C29.2 C30.2 C31.2 C32.2 C34.2 C43.2 FB3.1 R14.2 R20.1 U1.3 U1.4 U1.26 U1.46 U3.1 U3.10 U4.8 U5.6 U5.9 U6.6 U6.8 U7.5 | length 1341
  Top Layer w5.91: v4(4807.89,1861.65) 4834.39,1835.16 C7.2 ; C13.2 4910.49,2094.51 4927.58,2077.42 4927.73,2077.42 U1.46
  Top Layer w7.87: R14.2 4332.15,2256.97 4332.15,2222.4 v4(4332.89,2221.65) ; v2(4550,1990) 4550.25,1990.25 4550.25,2015.24 C1.2 4589.52,2015.48 FB3.1 ; FB3.1@4595.49,2010.48 cw(c4606.4,1999.58) 4606.4,2015 4635,2015 ; C7.2 C6.2 4884.47,1885 C5.2 ccw(c4848.79,1921.21) 4900,1921.21 4900,1930 cw(c4982.95,1930) 4924.3,1988.65 U1.3 U1.4 ; v7(5144.52,1660.48) 5144.52,1645.48 5150,1640 5150,1624.99 C34.2 5150.48,1581.01 cw(c5145.65,1581.01) U7.5 ccw(c5145.65,1580.05) U7.5@5149.52,1580.05 ; U1.26 5180.51,2050 v2(5195,2050) ; U4.8 5669.52,1648.52 C27.2 ; 5680,1695 5695.69,1695 v2(5696.54,1695.85)
  Bottom Layer w7.87: v4(5000,1755) 5006.39,1755 5015.91,1745.48 C22.2 ; v4(5000,1845) 5006.39,1845 5015.91,1854.52 C24.2 5040.49,1870.49 5046.49,1876.49 C23.2 5093.74,1870 5120,1870 5125,1865 5125,1845 5137.99,1832.01 5151.65,1832.01 U5.9 ; C22.2@5045,1744.99 5045,1735 5056.49,1723.51 C21.2 5123.51,1723.51 5154.61,1754.61 U5.6 ; v4(5604.33,1966.83) 5604.91,1966.25 5604.91,1931.07 C32.2 5605,1930.01 5605,1915 5595,1905 5595,1878.74 C31.2 5595,1875.76 5595,1850 5600,1845 5625,1845 5633.66,1836.34 5633.66,1819.45 U6.8 ; C29.2 5700,1878.74 5700,1900 5710,1910 5710,1930.01 C30.2 5712.41,1932.42 5712.41,1964.9 v4(5714.33,1966.83)
  other v4: 5735,2075 5682.39,2122.81 5757.39,2122.81
  other v5: 4889.56,2104.52
-3V3: C16.2 C17.2 C33.1 C37.2 FB2.2 L3.2 U7.2 U10.7 | length 982.6
  Top Layer w7.87: FB2.2@4779.5,2124.52 FB2.2 ; v4(4985,1545) v4@4988.09,1548.09 ; C33.1@5021.42,1548.09 C33.1
  Top Layer w12: v4@4988.09,1548.09 C33.1@5021.42,1548.09 ; C33.1@5029.41,1550.59 U7.2
  Bottom Layer w5.91: v4@4970,1545 v4(4985,1545)
  Bottom Layer w25: v2(4545,2125) 4545,2065 ccw(c4593.28,2065) 4559.14,2030.86 4570,2020 ccw(c4630.36,2080.36) 4630.36,1995 4753.58,1995 cw(c4753.58,1895) 4824.29,1965.71 4910.71,1879.29 cw(c4840,1808.58) 4940,1808.58 4940,1575 ccw(c4970,1575) v4@4970,1545
  other v2: 4555,2165 4520,2170 4587.19,2197.49
ADC1_CH2: C35.2 L4.2 U1.11 | length 244.3
  Top Layer w7.87: L4.2 4919.76,1700.24 4919.76,1735.25 C35.2 4919.52,1786.56 cw(c5019.52,1786.56) 4920,1796.37 cw(c5019.52,1786.56) 4948.81,1857.27 U1.11
CAP1: C44.1 C45.2 R23.2 U1.47 | length 167.1
  Top Layer w5.91: C44.1 4823.83,2073.83 4825,2075 4910.66,2075 U1.47
CAP2: C45.1 R23.1 U1.48 | length 116.4
  Top Layer w5.91: C45.1 4816.31,2047.98 4862.72,2047.98 4918.2,2047.98 U1.48
CS: U1.34 U5.3 U6.2 | length 1203
  Top Layer w7.87: U1.34 5124.62,2150 5245,2150 5304.25,2090.75 5304.25,1805.75 5345.64,1764.36 5473.01,1764.36 v2(5473.76,1765.11)
  Bottom Layer w7.87: U5.3 5300.63,1809.37 5345.64,1764.36 5473.01,1764.36 v2(5473.76,1765.11) 5544.89,1765.11 5585,1725 5655,1725 5662.2,1732.2 U6.2
FLASH_SCK: U1.31 U4.6 | length 1225.7
  Top Layer w7.87: U1.31 5143.08,2110 5228.17,2110 5265,2073.17 5265,1765 5360,1670 5375.29,1670 v2(5377.02,1668.27) ; U4.6 5705,1545 5773.27,1613.27 v2(5773.27,1668.4)
  Bottom Layer w7.87: v2@5377.02,1670 v2@5770,1670
GND: C1.1 C2.1 C5.1 C6.1 C7.1 C8.1 C9.1 C10.2 C11.1 C12.1 C13.1 C15.1 C16.1 C17.1 C19.2 C21.1 C22.1 C23.1 C24.1 C25.1 C26.1 C27.1 C29.1 C30.1 C31.1 C32.1 C33.2 C34.1 C35.1 C36.1 C37.1 C38.1 C40.1 C41.1 C42.1 C43.1 C44.2 C46.1 D5.1 D7.1 D8.1 K1.A1 K1.A12 K1.B1 K1.B12 K1.SH1 K1.SH2 K1.SH3 K1.SH4 K2.2 K3.1 pad.2 R1.2 R2.2 R3.1 R5.1 R10.1 R12.1 R16.1 T1.2 U1.49 U2.5 U3.3 U3.9 U3.11 U4.4 U4.9 U5.2 U5.7 U5.8 U6.1 U6.7 U8.4 U8.17 U8.20 U8.24 U8.33 U10.9 U10.10 U10.13 | length 2942
  Top Layer w5.91: R12.1 4430,2240.45 v4(4430,2210) ; C1.1 4551.66,2045 4570.21,2045 4580.21,2055 v5(4585,2055) ; v2(4708.76,2039.37) 4774.38,2039.37 C44.2 ; v4(4851.97,1734.82) 4890.5,1734.82 C35.1 ; v4(4855,1625) 4890.68,1625 C36.1 ; U2.5@5572.27,2595 5575,2592.27 U2.5 ; v4(5700,2385) 5700,2349.41 C46.1 ; C10.2 C10.2@5720,2653.74
  Top Layer w7.87: pad.2@4385,2090 pad.2@4428.16,2138.16 ; C2.1 4680.51,2038.86 4708.25,2038.86 v2(4708.76,2039.37) ; C15.1 4694.53,2398.81 4728.59,2398.81 v2(4729.29,2398.11) ; C8.1 4767.98,2608.11 v2(4814.29,2608.11) ; U10.9 4749.41,2300 cw(c4749.41,2309.84) v6(4739.57,2309.84) cw(c4749.41,2309.84) 4749.41,2319.69 U10.10 ; C19.2 4861.18,2435 v2(4874.29,2448.11) ; v4(4830,1790) C5.1 ; v5(4910.06,2223.74) 4910.28,2223.52 4910.28,2199.04 C38.1 ; v2(4914.29,2593.11) 4914.4,2593.22 4914.4,2631.06 C9.1 ; v4(4985,1581.5) 4985.99,1580.51 5023.52,1580.51 C33.2 ; R3.1 5169.44,2591.44 5202.82,2591.44 v2(5204.54,2589.72) ; C34.1 5180,1625.68 5180,1635 5185,1640 v7(5185,1660) ; R16.1 5239.3,1476.58 5268.42,1476.58 v2(5270,1475) ; U4.4 5488.94,1495 5553,1559.06 U4.9 ; R10.1 5558.16,2096.84 v6(5560,2095) ; U3.3 v6(5560,2095) ; U3.9 5579.69,2047.48 ccw(c5512.48,2047.48) v6(5560,2095) ; v2(5611.54,1695.85) 5611.72,1695.67 5640.99,1695.67 C27.1 ; v4(5670,1930) C25.1 ; C43.1 5686.69,2200.03 5686.69,2230.45 v4(5687.89,2231.65) ; C26.1 5724.83,2001.5 5764,2001.5 v4(5764.33,2001.83) ; D5.1 5892.89,2043.76 v4(5892.89,2006.65)
  Top Layer w15: v2(5445,2440) T1.2 ; R5.1 v2(5520,2460)
  Top Layer w20: v2(5515,2595) U2.5@5572.27,2595 ; v4(5720,2610) C10.2@5720,2653.74
  Top Layer w23: v2(5185,2410) C11.1
  Top Layer w25: C16.1 C17.1
  Bottom Layer w5.91: v2(5205,1830) v2@5205.47,1829.53 ; U5.2@5254.53,1829.53 U5.2
  Bottom Layer w7.87: R2.2 4367.15,2433.03 4367.15,2465.91 v4(4367.89,2466.65) ; K1.SH3 4555.42,2649.15 4631.73,2649.15 R1.2 ; v2(4980,2595) 4980.25,2594.75 5005.92,2594.75 C42.1 ; C22.1 5017.86,1795.48 5004.52,1795.48 v4(5000,1800) 5003.73,1803.73 5027.56,1803.73 5050,1826.17 C23.1@5084.42,1826.17 ; C22.1@5044.51,1773.83 5084.92,1773.83 C21.1 5116.66,1776.66 5129.69,1789.69 U5.7 ; U8.4 5133.08,2400.57 U8.33 5230.23,2414.49 5249.72,2433.97 U8.24 ; C23.1 5116.66,1823.34 5130.63,1809.37 U5.8 ; U8.17 5154.51,2531.41 5169.06,2545.95 5174.72,2545.95 5183.2,2554.43 C40.1 5204.54,2569.1 v2(5204.54,2589.72) ; D7.1 D7.1@5491.65,2595 ; D8.1@5538.35,2595 D8.1 ; v2(5606.26,1750.99) 5607.52,1752.25 5635.36,1752.25 U6.1 ; U6.7 5662.2,1837.8 5650,1850 5650,1873.91 C31.1 5645,1878.91 5645,1900 5634.08,1910.92 5634.08,1930.25 5669.75,1930.25 v4(5670,1930) ; C29.1 5750,1878.91 5750,1900 5741.55,1908.45 5741.55,1932.27 5741.08,1932.75 5772.75,1932.75 v4(5775,1935)
  Bottom Layer w10: v2@5205.47,1829.53 U5.2@5254.53,1829.53
  Bottom Layer w20: D7.1@5491.65,2595 v2(5515,2595) D8.1@5538.35,2595
  other v1: 4450,1387 4575,1387 4704.29,1387 4820,1387 4945,1387 5074.29,1387 5915,1387.5 5195,1390 5320,1390 5449.29,1390 5565,1390 5690,1390 5819.29,1390 4334.53,1403.05 5980,1410 4764.9,1435.25 4285,1500.29 6015,1515.71 4764.9,1525.25 4764.9,1625.25 4285,1629.58 6015,1645 4764.9,1715.25 4285,1754.58 6015,1770 4764.9,1810.25 4285,1870.29 4729.9,1880.25 6015,1885.71 4664.9,1940.25 4309.9,1945.25 4374.9,1945.25 4474.9,1945.25 4569.9,1945.25 4285,1999.58 6015,2015 4285,2124.58 6015,2140 4280,2230.29 6010,2245.71 4280,2359.58 6010,2375 4280,2484.58 6010,2500 4280,2600.29 6010,2615.71 4315,2705 5970,2705 4480,2725 4605,2725 4734.29,2725 4850,2725 4975,2725 5104.29,2725 5225,2728 5350,2728 5479.29,2728 5595,2728 5720,2728 5849.29,2728
  other v2: 5122.13,2359.29 5152.13,2384.29 5092.13,2389.29 5067.13,2414.29 5130.2,2418.78 5102.13,2444.29 5163.08,2444.49 5135,2470
  other v3: 4839.13,1448.89 4839.13,1503.89
  other v4: 5522.89,1521.65 5582.89,1576.65 5517.89,1611.65 5037.89,1951.65 5007.89,1981.65 5067.89,1986.65 4977.89,2016.65 5042.89,2016.65 5097.89,2016.65 5012.89,2051.65 5072.89,2051.65 5042.89,2081.65 5437.11,2096.82 5277.11,2206.82 5122.11,2256.82
  other v5: 4630,2060 4670,2070 4745.06,2078.74 4710,2080 4889.56,2134.52 4655.06,2138.74
  other v6: 5530.47,2075.32 5589.53,2075.32 5530.47,2114.69 5589.53,2114.69 4719.88,2270.47 4700.2,2309.84 4719.88,2349.21
HOLD: U1.33 U4.7 | length 1235.5
  Top Layer w7.87: U1.33 5131.23,2137.13 5237.87,2137.13 5291.38,2083.62 5291.38,1798.62 5365,1725 5470,1725 5535,1790 5690,1790 5725,1755 5725,1615 5705,1595 U4.7
MISO_FLASH: U1.29 U4.5 | length 1315.1
  Top Layer w5.91: U4.5 5695,1495 5710,1510 5710,1520 5735,1545
  Top Layer w7.87: U1.29 5156.3,2084.25 5217.51,2084.25 5239.25,2062.51 5239.25,1710.75 5327.12,1622.88 v2(5356.4,1622.88) ; 5735,1545 5808.27,1618.27 v2(5808.27,1643.4)
  Bottom Layer w7.87: v2(5356.4,1622.88) 5457.88,1622.88 5480,1645 v2@5805,1645
MOSI/MISO: U1.36 U5.4 U6.5 | length 1430.4
  Top Layer w7.87: U1.36 5115.64,2180 5255,2180 5330,2105 5330,1825 5350,1805 v2@5420,1805
  Bottom Layer w5.91: 5185,1835 5185,1810 5205.31,1789.69 U5.4
  Bottom Layer w7.87: 5185,1835 5185,1870 5215,1900 5255,1900 5349.89,1805.11 v2(5423.76,1805.11) 5424.5,1805.86 5584.14,1805.86 5595,1795 5710,1795 5715,1800 5715,1805
MOSI_FLASH: U1.28 U4.2 | length 724.5
  Top Layer w7.87: U1.28 5162.92,2071.38 5212.17,2071.38 5226.38,2057.17 5226.38,1683.62 5315,1595 U4.2
NetC2_2: C2.2 FB3.2 U1.1 | length 264.8
  Top Layer w7.87: FB3.2@4653.06,2010 C2.2 4813.79,2010 cw(c4813.79,1958.79) 4850,1995 ccw(c4857.42,2002.42) 4857.42,1991.93 4870,1991.93 ccw(c4870,2036.82) 4901.74,2005.08 U1.1
NetC3_2: C3.2 L1.2 R25.1 | length 205.7
  Top Layer w7.87: L1.2 cw(c4626.89,1684.09) 4626.89,1699.52 C3.2 4654.51,1786.93 cw(c4754.51,1786.93) R25.1@4683.8,1857.64
NetC4_2: C4.2 K7.2 L1.1 | length 111.9
  Top Layer w7.87: K7.2 4515.3,1701.26 cw(c4515.3,1695.31) C4.2 4551.76,1699.52 ccw(c4551.76,1718.24) L1.1@4565,1705
NetC8_2: C8.2 F1.1 FB1.2 | length 122.5
  Top Layer w7.87: FB1.2@4817.84,2666.17 FB1.2
  Top Layer w30: F1.1 FB1.2@4817.84,2666.17
NetC12_2: C12.2 R11.2 U3.7 | length 620.6
  Top Layer w5.91: v2(5535.58,1992.73) 5537.95,1995.1 5537.95,2034.56 U3.7
  Top Layer w7.87: R11.2 C12.2@5316.5,2212.2 ; C12.2 5320.71,2204.82 cw(c5250,2134.11) 5350,2134.11 5350,1983.28 ccw(c5418.28,1983.28) 5370,1935 ccw(c5406.21,1971.21) 5406.21,1920 v2@5535,1920
  Bottom Layer w7.87: v2(5540,1920.4) v2@5540,1995
NetC15_2: C15.2 U10.1 | length 45.4
  Top Layer w7.87: U10.1@4664.76,2359.68 4664.76,2392.13 4665,2392.37 C15.2@4665,2405
NetC20_1: C20.1 L3.1 U10.8 | length 140.2
  Top Layer w6: C20.1@4824.29,2281.81 cw(c4824.29,2273.34) C20.1 cw(c4832.75,2270.74) C20.1@4835.35,2270.74
  Top Layer w10: U10.8 C20.1@4821.54,2280.31
  Top Layer w40: L3.1 C20.1@4832.6,2269.25
NetC20_2: C20.2 U10.11 | length 65.1
  Top Layer w6: C20.2@4819.87,2339.37 cw(c4819.87,2326.49) C20.2
  Top Layer w10: U10.11 C20.2@4819.87,2339.37
NetC36_2: C36.2 L4.1 R17.2 U7.1 | length 359.4
  Top Layer w7.87: L4.1 4919.76,1664.33 4919.76,1625.73 C36.2 5049.51,1625.49 5083.16,1591.84 5083.16,1578.02 U7.1 5099.45,1576.18 5122.91,1552.72 R17.2
NetC38_2: C38.2 FB2.1 U1.43 | length 231.2
  Top Layer w6: FB2.1 4835,2124.72 4845.39,2135.11 4865.11,2135.11 4870,2140 4870,2155 4885.48,2170.48 C38.2 4934.52,2170.48 4945,2160 4945,2118.61 U1.43
NetC42_2: C42.2 U8.16 | length 94.9
  Bottom Layer w7.87: 5045,2595 5050,2595 U8.16
NetC46_2: C46.2 K2.1 Q1.3 U2.9 U2.10
NetD2_1: D2.1 R7.1 | length 72.9
  Top Layer w7.87: D2.1 5419.57,2630 ccw(c5419.57,2635) R7.1@5424.57,2635
NetD3_1: D3.1 R6.1 | length 68.6
  Top Layer w7.87: D3.1 R6.1@5423.16,2560
NetD5_2: D5.2 R20.2 | length 57.1
  Top Layer w7.87: D5.2 5848.35,2091.65 ccw(c5845,2091.65) 5845,2095 5845.88,2095 cw(c5845.88,2092.28) R20.2
NetD7_2: D7.2 R21.2 | length 167.9
  Bottom Layer w7.87: R21.2 5347.72,2537.72 5363.35,2553.35 D7.2
NetD8_2: D8.2 R22.2 | length 251.9
  Bottom Layer w7.87: R22.2 5522.72,2502.72 5540,2520 D8.2
NetD?_1: D?.1 R8.1 | length 73.3
  Top Layer w7.87: D?.1 5357.24,2487.28 R8.1 cw(c5420.88,2487.28) R8.1@5420.88,2485
NetF1_2: F1.2 K1.A4 K1.A9 K1.B4 K1.B9 | length 462
  Top Layer w7.87: F1.2 F1.2@4701.72,2559.1
  Top Layer w25: K1.A4@4574.55,2568.28 F1.2@4691.72,2568.28
  Bottom Layer w7.87: K1.B9@4514.73,2565.34 K1.B9@4521.4,2572.01
  Bottom Layer w25: K1.B9@4514.73,2565.34 4495.34,2565.34 4475,2545 4475,2420 4494.04,2400.96 K1.B4 K1.A9 K1.A9@4574.55,2400.96 ; K1.B9@4521.4,2568.28 K1.A4
NetK1_A5: K1.A5 R1.1 | length 118.8
  Bottom Layer w7.87: K1.A5 4619.81,2534.81 4640,2555 4640,2595
NetK1_B5: K1.B5 R2.1 | length 118
  Top Layer w7.87: v4@4435,2435 4435.58,2434.42 K1.B5
  Bottom Layer w7.87: R2.1 4402.15,2431.97 4437.58,2431.97 v4(4437.89,2431.65)
NetK3_2: K3.2 U7.3 | length 170
  Top Layer w7.87: K3.2@4935,1465 4949.55,1465 ccw(c4949.55,1535.61) 4999.48,1485.68 ccw(c4938.58,1565) 5009.29,1494.29 5030,1515 cw(c5054.14,1490.86) 5054.14,1525 U7.3
NetL2_1: L2.1 U3.4 | length 66.3
  Top Layer w7.87: L2.1 L2.1@5540.31,2194.09
  Top Layer w10: U3.4 L2.1@5540.31,2194.09
NetL2_2: L2.2 U3.2 | length 66.3
  Top Layer w7.87: L2.2@5579.69,2194.09 L2.2
  Top Layer w10: U3.2 L2.2@5579.69,2194.09
NetR5_2: R5.2 U2.6 | length 78.9
  Top Layer w7.87: R5.2 5573.18,2400 5575,2401.82 U2.6
NetR6_2: R6.2 U2.3 | length 220.6
  Top Layer w7.87: R6.2 5502.72,2562.28 5535,2530 5605,2530 5615,2540 5615,2545 5614.37,2545.63 U2.3
NetR7_2: R7.2 U2.4 | length 175.2
  Top Layer w7.87: R7.2 5582.72,2632.28 5595,2620 5595,2586.73 U2.4
NetR8_2: R8.2 U2.7 | length 188.7
  Top Layer w7.87: R8.2 5577.72,2487.28 5595,2470 5595,2425.31 U2.7
NetR9_1: R9.1 R10.2 U3.6 | length 152.9
  Top Layer w7.87: R10.2 R9.1 5495.29,1996.84 ccw(c5495.29,2024.71) 5515,2005 ccw(c5501.41,2018.59) 5520.63,2018.59 U3.6
NetR12_2: R12.2 R13.1 U10.5 | length 252.3
  Top Layer w6: R12.2 4463.6,2224.61 4470.05,2218.16 R13.1 4538.5,2218.16 ccw(c4538.5,2241.5) 4555,2225 4557.93,2227.93 cw(c4575,2210.86) 4575,2235 4619.45,2235 ccw(c4619.45,2250.55) 4635,2250.55 cw(c4664.76,2250.55) 4635.08,2252.73 cw(c4664.76,2250.55) 4645.53,2273.27 cw(c4664.76,2250.55) U10.5
NetR13_2: R13.2 U10.4 | length 177.5
  Top Layer w6: R13.2@4512.72,2255.43 4608.17,2255.43 ccw(c4608.17,2273.91) 4626.64,2273.91 cw(c4652.73,2273.91) 4630.84,2288.1 cw(c4652.73,2273.91) 4652.73,2300
  Top Layer w7.87: 4652.73,2300 U10.4
NetR14_1: R14.1 U10.3 | length 336.6
  Top Layer w6: R14.1 4397.72,2257.72 4420,2280 4600,2280 ccw(c4600,2300) 4616.62,2288.87 ccw(c4610.07,2293.25) 4617.24,2289.98 cw(c4652.73,2273.91) 4618.43,2292.39 ccw(c4611.48,2296.09) 4618.93,2293.54 ccw(c4600,2300) 4620,2300 cw(c4639.69,2300) 4639.69,2319.68 U10.3
  Top Layer w7.87: R14.1@4360,2255 R14.1@4366.84,2255
NetR16_2: R16.2 R17.1 U7.4 | length 135.7
  Top Layer w7.87: U7.4 5185,1525 5195,1515 5236.31,1515 R16.2@5237.28,1514.04 ; R17.1 5237.28,1552.28 R16.2@5237.28,1514.04 ; R16.2 R16.2@5237.28,1514.04
NetR18_2: R18.2 U8.14 | length 469.3
  Top Layer w7.87: R18.2 4679.74,2501.14 4713.86,2501.14 v2(4715,2500)
  Bottom Layer w7.87: v2(4715,2500) 4740,2475 4840,2475 4905,2540 5050,2540 U8.14@5092.18,2497.82
NetR19_2: R19.2 U8.15 | length 481.4
  Top Layer w7.87: R19.2 4727.28,2467.28 4765,2505 v2@4800,2505
  Bottom Layer w7.87: v2(4800.3,2503.48) 4833.48,2503.48 4890,2560 5057.16,2560 5101.08,2516.08 U8.15@5103.03,2516.08
NetR21_1: R21.1 U8.21 | length 112.7
  Bottom Layer w7.87: U8.21 5270.53,2538.02 5288.46,2538.02 R21.1@5293.16,2542.72
NetR22_1: R22.1 U8.22 | length 87.9
  Bottom Layer w7.87: U8.22 5263.06,2502.72 R22.1
NetR25_2: R25.2 U1.2 | length 176.6
  Top Layer w7.87: R25.2@4765,1928.09 4772.62,1935.71 cw(c4843.33,1865) 4843.33,1965 4870,1965 ccw(c4870,1991.93) 4889.04,1972.89 U1.2
NetT1_1: T1.1 U2.8 | length 212.8
  Top Layer w7.87: T1.1 5475,2380 5485,2370 5603.62,2370 5613.62,2380 5613.62,2424.25 U2.8
Post_LiPo_+5V: C11.2 D4.1 Q1.2 R9.2 R11.1 U3.5 U3.8 | length 12.9
  Top Layer w7.87: Q1.2@5300.71,2356.39 Q1.2@5300.71,2369.29
RF_GND: C3.1 C4.1 K7.3 K7.4 K7.6
  other v3: 4451.64,1439.67 4515,1440 4573.08,1440 4633.08,1440 4691.16,1440 4390.48,1441 4666.16,1483.67 4546.92,1485 4605,1485 4358.56,1486 4418.56,1486 4476.64,1486 4331.92,1530 4391.92,1530 4450,1530 4515,1530 4573.08,1530 4633.08,1530 4691.16,1530 4666.16,1573.67 4546.92,1575 4605,1575 4515,1620 4573.08,1620 4633.08,1620 4691.16,1620 4695,1700 4695,1750 4500,1755 4558.08,1755 4615,1755 4530,1800 4588.08,1800 4380,1845 4438.08,1845 4498.08,1845 4556.16,1845 4346.92,1891.33 4405,1891.33 4465,1891.33 4523.08,1891.33
RX: U1.40 U8.30 | length 380.6
  Top Layer w7.87: v2(4990,2185) 4990,2132.07 U1.40
  Bottom Layer w7.87: v2(4990,2185) 5105,2185 5205,2285 5205,2300 5180.4,2324.6 U8.30
SCK: U1.35 U5.1 U6.4 | length 1216.7
  Top Layer w7.87: U1.35 5120.13,2165 5250,2165 5317.13,2097.87 5317.13,1812.87 5345.64,1784.36 5448.01,1784.36 v2(5448.76,1785.11)
  Bottom Layer w7.87: U5.1 5281.26,1848.74 5345.64,1784.36 5448.01,1784.36 v2(5448.76,1785.11) 5449.5,1785.86 5569.14,1785.86 5580,1775 5705,1775 5715,1765
SPI_CS_Flash: U1.30 U4.1 | length 708.1
  Top Layer w7.87: U1.30 5149.69,2097.13 5222.84,2097.13 5252.13,2067.84 5252.13,1742.87 5350,1645 U4.1
TX: U1.41 U8.2 | length 323.4
  Top Layer w7.87: v2(4960,2220) 4960,2142.59 U1.41
  Bottom Layer w7.87: v2(4960,2220) 4960,2252.56 5002.44,2295 5083.19,2295 U8.2
USB_5V: C9.2 C10.1 C19.1 C40.2 C41.2 D2.2 D3.2 D4.2 D?.2 FB1.1 Q1.1 R3.2 U2.1 U2.2 U8.1 U8.19 U10.2 U10.12 | length 192.5
  Top Layer w7.87: FB1.1 FB1.1@4875.48,2659.52
  Bottom Layer w7.87: 5088.1,2272.07 U8.1 ; U8.19 5180.4,2504.22 C40.2@5210.24,2534.06 ; C40.2 5209.92,2534.65 5245,2569.73 v2(5245,2570)
  Bottom Layer w17: v2(5040,2270) 5057.46,2252.54 5074.55,2252.54 5082.63,2260.61 C41.2
USB_D+: K1.A6 K1.B6 R18.1 | length 138.2
  Top Layer w7.87: K1.B6@4521.4,2467.89 4551.49,2497.98 4571.18,2497.98 4574.55,2501.35 4643.65,2501.35 cw(c4643.65,2500) R18.1@4645,2500
USB_D-: K1.A7 K1.B7 R19.1 | length 138.8
  Top Layer w7.87: K1.A7@4574.55,2467.89 4637.56,2467.89 cw(c4637.56,2462.28) R19.1@4643.16,2462.28
  Bottom Layer w7.87: K1.B7@4521.4,2501.35 4551.49,2471.26 4571.18,2471.26 K1.A7@4574.55,2467.89
WP: U1.32 U4.3 | length 878.9
  Top Layer w7.87: U1.32 5137.84,2124.25 5232.13,2124.25 5278.5,2077.87 5278.5,1783.75 v2(5308.65,1753.6) ; v2(5312.92,1545) U4.3
  Bottom Layer w7.87: v2(5308.65,1753.6) 5308.65,1551.35 v2@5310,1550
pads on no net: K1.A8 K1.B8 K7.1 K7.5 U1.5 U1.6 U1.7 U1.8 U1.9 U1.10 U1.12 U1.13 U1.14 U1.15 U1.16 U1.17 U1.18 U1.19 U1.20 U1.21 U1.22 U1.23 U1.24 U1.25 U1.27 U1.37 U1.38 U1.39 U1.42 U1.44 U1.45 U5.5 U5.10 U6.3 U8.3 U8.5 U8.6 U8.7 U8.8 U8.9 U8.10 U8.11 U8.12 U8.13 U8.18 U8.23 U8.25 U8.26 U8.27 U8.28 U8.29 U8.31 U8.32 U10.6

## Polygon pours and split planes (outlines as drawn)
RF_GND on GND "RF_GND_L02_P029" (solid, pour order 29): 4300,1495 ccw(c4390,1495) 4390,1405 4740,1405 ccw(c4740,1410) 4745,1410 4745,1815 ccw(c4696.72,1815) 4730.86,1849.14 4653.54,1926.46 ccw(c4645,1917.93) 4645,1930 4315,1930 ccw(c4315,1915) 4300,1915
GND on GND "GND_L02_P030" (solid, pour order 30): 4264.65,1486.26 4264.65,2627.99 cw(c4382.76,2627.99) 4382.76,2746.1 5918.19,2746.1 cw(c5918.19,2627.99) 6036.3,2627.99 6036.3,1486.26 cw(c5918.19,1486.26) 5918.19,1368.15 4382.76,1368.15 cw(c4382.76,1486.26)
GND on Top Layer "GND_L01_P034" (solid, pour order 34): 4264.65,1486.26 4264.65,2627.99 cw(c4382.76,2627.99) 4382.76,2746.1 5918.19,2746.1 cw(c5918.19,2627.99) 6036.3,2627.99 6036.3,1486.26 cw(c5918.19,1486.26) 5918.19,1368.15 4382.76,1368.15 cw(c4382.76,1486.26)
RF_GND on Top Layer "RF_GND_L01_P032" (solid, pour order 32): 4739.49,1405.96 4738.25,1404.72 4395.43,1404.72 cw(c4395.43,1504.72) 4295.43,1504.72 4295.43,1914.72 cw(c4310.43,1914.72) 4310.43,1929.72 4640.43,1929.72 cw(c4640.43,1917.64) 4648.97,1926.18 4725.43,1849.72 cw(c4689.22,1813.5) 4740.43,1813.5
+3V3 on Top Layer "+3V3_L01_P028" (solid, pour order 28): 5595,2020 5595,2050 cw(c5600,2050) 5600,2055 5645,2055 ccw(c5645,2060) 5650,2060 5650,2125 ccw(c5640,2125) 5640,2135 5600,2135 cw(c5600,2140) 5595,2140 5595,2170 5645,2170 ccw(c5645,2175) 5650,2175 cw(c5655,2175) 5655,2180 5785,2180 cw(c5785,2145) 5820,2145 5820,2035 cw(c5805,2035) 5805,2020
Post_LiPo_+5V on Top Layer "POST_LIPO_+5V_L01_P025" (solid, pour order 25): 5150,2490 5288.35,2351.65 ccw(c5297.23,2360.53) 5297.23,2347.97 ccw(c5297.23,2349.77) 5298.5,2348.5 5320,2370 5165,2525
Post_LiPo_+5V on Top Layer "POST_LIPO_+5V_L01_P024" (solid, pour order 24): 5262.31,2347.31 5296.46,2381.46 cw(c5305,2372.93) 5305,2385 5335,2355 5303.54,2323.54 ccw(c5312.07,2315) 5300,2315
Post_LiPo_+5V on Top Layer "POST_LIPO_+5V_L01_P023" (solid, pour order 23): 5260,2305 5357.93,2207.07 cw(c5340.86,2190) 5365,2190 5365,1991.21 ccw(c5416.21,1991.21) 5380,1955 ccw(c5392.07,1967.07) 5392.07,1950 5560,1950 ccw(c5560,1960) 5570,1960 5570,2045 ccw(c5560,2045) 5560,2055 ccw(c5560,2050) 5555,2050 5555,1980 cw(c5545,1980) 5545,1970 5420,1970 cw(c5420,1975) 5415,1975 5415,2120 cw(c5425,2120) 5425,2130 5430,2130 ccw(c5430,2135) 5435,2135 cw(c5440,2135) 5440,2140 5520,2140 ccw(c5520,2145) 5525,2145 5525,2170 ccw(c5520,2170) 5520,2175 5455,2175 cw(c5455,2187.07) 5446.46,2178.54 5278.54,2346.46 ccw(c5270,2337.93) 5270,2350 ccw(c5270,2337.93) 5261.46,2346.46 5240,2325 5240,2320
NetC46_2 on Top Layer "NETC46_2_L01_P020" (solid, pour order 20): 5665,2320 ccw(c5670,2320) 5670,2315 5925,2315 cw(c5925,2310) 5930,2310 5930,2235 cw(c5925,2235) 5925,2230 5855,2230 cw(c5855,2240) 5845,2240 5845,2250 ccw(c5840,2250) 5840,2255 5440,2255 cw(c5440,2279.14) 5422.93,2262.07 5360,2325 cw(c5384.14,2325) 5367.07,2342.07 5390,2365 5392.93,2365 cw(c5392.93,2347.93) 5405,2360 5444.39,2320.61 ccw(c5470,2346.21) 5470,2310 5600,2310 ccw(c5600,2335) 5625,2335 5625,2460 cw(c5630,2460) 5630,2465 5660,2465 cw(c5660,2460) 5665,2460
USB_5V on Top Layer "USB_5V_L01_P019" (solid, pour order 19): 5255,2465 ccw(c5270,2465) 5270,2450 5275,2450 cw(c5275,2401.72) 5309.14,2435.86 5361.46,2383.54 ccw(c5370,2392.07) 5370,2380 5391.46,2401.46 ccw(c5382.93,2410) 5395,2410 5395,2412.93 ccw(c5377.93,2412.93) 5390,2425 5358.54,2456.46 ccw(c5350,2447.93) 5350,2460 5325,2460 cw(c5325,2470) 5315,2470 5315,2510 ccw(c5310,2510) 5310,2515 cw(c5310,2520) 5305,2520
USB_5V on Top Layer "USB_5V_L01_P018" (solid, pour order 18): 5306.32,2688.48 5671.32,2688.48 ccw(c5671.32,2693.68) 5675,2690 5675,2550 5625,2550 5625,2645 ccw(c5610,2645) 5610,2660 5309.31,2660 ccw(c5309.31,2657.01) 5306.32,2657.01
USB_5V on Top Layer "USB_5V_L01_P017" (solid, pour order 17): 5245,2550 cw(c5220.86,2525.86) 5255,2525.86 5255,2465 5305,2465 5305,2550.2 cw(c5310.64,2550.2) 5306.65,2554.19
USB_5V on Top Layer "USB_5V_L01_P016" (solid, pour order 16): 5224.01,2613.66 cw(c5225.54,2613.66) 5225.54,2615.18 5231.65,2615.18 cw(c5231.65,2605.18) 5241.65,2605.18 5241.65,2594.33 cw(c5207.51,2594.33) 5231.65,2570.18 5251.65,2550.18 5301.65,2550.18 ccw(c5301.65,2555.18) 5306.65,2555.18 5306.65,2635.18 ccw(c5301.65,2635.18) 5301.65,2640.18
USB_5V on Top Layer "USB_5V_L01_P015" (solid, pour order 15): 5217.36,2613.48 cw(c5218.88,2613.48) 5218.88,2615 5225,2615 cw(c5225,2605) 5235,2605 5235,2594.14 cw(c5200.86,2594.14) 5225,2570 5245,2550 5295,2550 ccw(c5295,2555) 5300,2555 5300,2635 ccw(c5295,2635) 5295,2640
-3V3 on Top Layer "-3V3_L01_P011" (solid, pour order 11): 4765,2115 cw(c4765,2110) 4770,2110 4770,2105 ccw(c4775,2105) 4775,2100 4790,2100 ccw(c4790,2110) 4800,2110 4800,2140 ccw(c4795,2140) 4795,2145 cw(c4795,2150) 4790,2150 4790,2163.01 ccw(c4788.01,2163.01) 4788.01,2165 4725,2165 ccw(c4725,2163.01) 4723.01,2163.01 4723.01,2155 cw(c4723.01,2143.01) 4735,2143.01 4735,2115
-3V3 on Top Layer "-3V3_L01_P009" (solid, pour order 9): 4608.01,2220 4570,2220 ccw(c4570,2205) 4555,2205 cw(c4540,2205) 4540,2190 4510,2190 ccw(c4510,2180) 4500,2180 4500,2155 ccw(c4505,2155) 4505,2150 cw(c4505,2145) 4510,2145 4510,2100 ccw(c4515,2100) 4515,2095 4570,2095 ccw(c4570,2100) 4575,2100 4575,2143.37 cw(c4606.72,2143.37) 4606.72,2175.1
-3V3 on Top Layer "-3V3_L01_P008" (solid, pour order 8): 4602.72,2176.25 ccw(c4603.97,2176.25) 4603.97,2175 4705,2175 cw(c4705,2165) 4715,2165 ccw(c4725,2165) 4725,2155 4780,2155 ccw(c4780,2165) 4790,2165 4790,2260 ccw(c4785,2260) 4785,2265 4765,2265 ccw(c4765,2260) 4760,2260 4760,2235 cw(c4755,2235) 4755,2230 4655,2230 ccw(c4655,2220) 4645,2220 4610,2220 ccw(c4610,2210) 4600,2210 4600,2180 ccw(c4605,2180) 4605,2175
USB_5V on Top Layer "USB_5V_L01_P007" (solid, pour order 7): 4760,2361.46 4760,2425 ccw(c4755,2425) 4755,2430 4670,2430 ccw(c4670,2405) 4645,2405 4645,2355 ccw(c4655,2355) 4655,2345 4675,2345 cw(c4675,2340) 4680,2340 4680,2335 cw(c4675,2335) 4675,2330 4635,2330 cw(c4635,2345) 4620,2345 4620,2430 cw(c4635,2430) 4635,2445 4775,2445 cw(c4775,2435) 4785,2435 4785,2395 ccw(c4790,2395) 4790,2390
USB_5V on Top Layer "USB_5V_L01_P004" (solid, remove dead copper, pour order 4): 4855,2648.48 5041.32,2648.48 cw(c5041.32,2638.48) 5051.32,2638.48 5051.32,2598.48 cw(c5039.25,2598.48) 5047.79,2589.94 4860.47,2402.62 ccw(c4894.61,2368.48) 4846.32,2368.48 4846.32,2283.48 ccw(c4876.32,2283.48) 4876.32,2253.48 5046.32,2253.48 ccw(c5046.32,2268.48) 5061.32,2268.48 5061.32,2293.48 ccw(c5037.18,2293.48) 5054.25,2310.55 4985.47,2379.34 cw(c5019.61,2413.48) 4971.32,2413.48 cw(c5055.82,2413.48) 4996.07,2473.23 5131.32,2608.48 cw(c5143.4,2596.41) 5143.4,2613.48 5301.32,2613.48 ccw(c5289.25,2625.55) 5306.32,2625.55 5306.32,2688.48 4855,2688.48
USB_5V on Top Layer "USB_5V_L01_P005" (solid, pour order 5): 4865,2405 cw(c4828.79,2441.21) 4828.79,2390 4777.07,2390 ccw(c4777.07,2372.93) 4765,2385 ccw(c4777.07,2372.93) 4760,2372.93 4760,2350 4860,2350
GND on Bottom Layer "GND_L04_P035" (solid, pour order 35): 4264.65,1486.26 4264.65,2627.99 cw(c4382.76,2627.99) 4382.76,2746.1 5918.19,2746.1 cw(c5918.19,2627.99) 6036.3,2627.99 6036.3,1486.26 cw(c5918.19,1486.26) 5918.19,1368.15 4382.76,1368.15 cw(c4382.76,1486.26)
RF_GND on Bottom Layer "RF_GND_L04_P031" (solid, pour order 31): 4744.06,1406.25 4742.81,1405 4400,1405 cw(c4400,1505) 4300,1505 4300,1915 cw(c4315,1915) 4315,1930 4645,1930 cw(c4645,1917.93) 4653.54,1926.46 4730,1850 cw(c4693.79,1813.79) 4745,1813.79
+3V3 on PWR "+3V3_L03_P033" (solid, pour order 33): 4264.65,1486.26 4264.65,2627.99 cw(c4382.76,2627.99) 4382.76,2746.1 5918.19,2746.1 cw(c5918.19,2627.99) 6036.3,2627.99 6036.3,1486.26 cw(c5918.19,1486.26) 5918.19,1368.15 4382.76,1368.15 cw(c4382.76,1486.26)

## Other copper
Top Layer:
  region net GND: 4265,1900.64 4265,1470.64 ccw(c4365,1470.64) 4365,1370.64 4785,1370.64 4785,1814.22 ccw(c4685,1814.22) 4755.71,1884.93 4704.75,1935.89 ccw(c4645,1876.14) 4645,1960.64 4290,1960.64 ccw(c4290,1935.64) 4265,1935.64 4265,1875.64 4300,1875.64 4300,1915.64 cw(c4315,1915.64) 4315,1930.64 4645,1930.64 cw(c4645,1918.57) 4653.54,1927.1 4730,1850.64 cw(c4693.79,1814.43) 4745,1814.43 4745,1410.64 cw(c4735,1410.64) 4735,1400.64 4400,1400.64 cw(c4400,1500.64) 4300,1500.64 4300,1875.64
  region net GND: 5995,2561.41 5995,2605 ccw(c5895,2605) 5895,2705 5860,2705 5860,2745 5935,2745 cw(c5935,2645) 6035,2645 6035,2560
  region net GND: 5995,1515.84 5995,1485 cw(c5915,1485) 5915,1405 5915,1370 5935,1370 ccw(c5935,1470) 6035,1470 6035,1515
  region net GND: 4300,1915 4300,2635 cw(c4370,2635) 4370,2705 5905,2705 cw(c5905,2605) 5995,2561.41 5995,1515.84 cw(c5925.53,1482.19) 5925.53,1405 4385.68,1405 cw(c4385.68,1490.2) 4300.48,1490.2 4300.48,1960 4265,1960 4265,2645 cw(c4365,2645) 4365,2745 5935,2745 cw(c5935,2645) 6035,2645 6035,1470 cw(c5935,1470) 5935,1370 4365,1370 cw(c4365,1470) 4265,1470 4265,1960
  pour cut-out: 4795,2350 4795,2355 4870,2355 4870,2259.8 ccw(c4876.32,2259.8) 4876.32,2253.48 4864.19,2253.48 cw(c4864.19,2265.23) 4852.44,2265.23 4852.44,2343.1 ccw(c4846.32,2343.1) 4846.32,2349.21
  pour cut-out: 4816.22,1833.78 ccw(c4805.45,1833.78) 4784.61,1854.61 4790,1860
  region net GND: 4265,1900 4265,1875 4300,1875
Bottom Layer:
  region net GND: 4265,1900 4265,1470 ccw(c4365,1470) 4365,1370 4785,1370 4785,1813.58 ccw(c4685,1813.58) 4755.71,1884.29 4704.75,1935.25 ccw(c4645,1875.5) 4645,1960 4290,1960 ccw(c4290,1935) 4265,1935 4265,1875 4300,1875 4300,1915 cw(c4315,1915) 4315,1930 4645,1930 cw(c4645,1917.93) 4653.54,1926.46 4730,1850 cw(c4693.79,1813.79) 4745,1813.79 4745,1410 cw(c4735,1410) 4735,1400 4400,1400 cw(c4400,1500) 4300,1500 4300,1875
  region net GND: 5995,2561.41 5995,2605 ccw(c5895,2605) 5895,2705 5860,2705 5860,2745 5935,2745 cw(c5935,2645) 6035,2645 6035,2560
  region net GND: 5995,1515.84 5995,1485 cw(c5915,1485) 5915,1405 5915,1370 5935,1370 ccw(c5935,1470) 6035,1470 6035,1515
  region net GND: 4300,1915 4300,2635 cw(c4370,2635) 4370,2705 5905,2705 cw(c5905,2605) 5995,2561.41 5995,1515.84 cw(c5925.53,1482.19) 5925.53,1405 4385.68,1405 cw(c4385.68,1490.2) 4300.48,1490.2 4300.48,1960 4265,1960 4265,2645 cw(c4365,2645) 4365,2745 5935,2745 cw(c5935,2645) 6035,2645 6035,1470 cw(c5935,1470) 5935,1370 4365,1370 cw(c4365,1470) 4265,1470 4265,1960

## Silkscreen, mask and mechanical layers (free items; w line width, h text height)
Top Overlay:
  text "DATA EXTRACT" at 4755,2545 h23
Mechanical 1:
  the board outline again, w10
  text "NOT DONE PROPERLY" at 4225,2950 h60

## Text inside footprints (layer, text, board x,y; h text height)
D5: Top Overlay "+" at 5826.69,2058.78 h27.56 r180
D7: Bottom Overlay "+" at 5503.77,2531.69 h27.56 r90
D8: Bottom Overlay "+" at 5553.77,2531.69 h27.56 r90